# EAGLE board SparkFun_Qwiic_UV_Sensor_AS7331-Panel (EAGLE 9.6.2), part 1 of 4
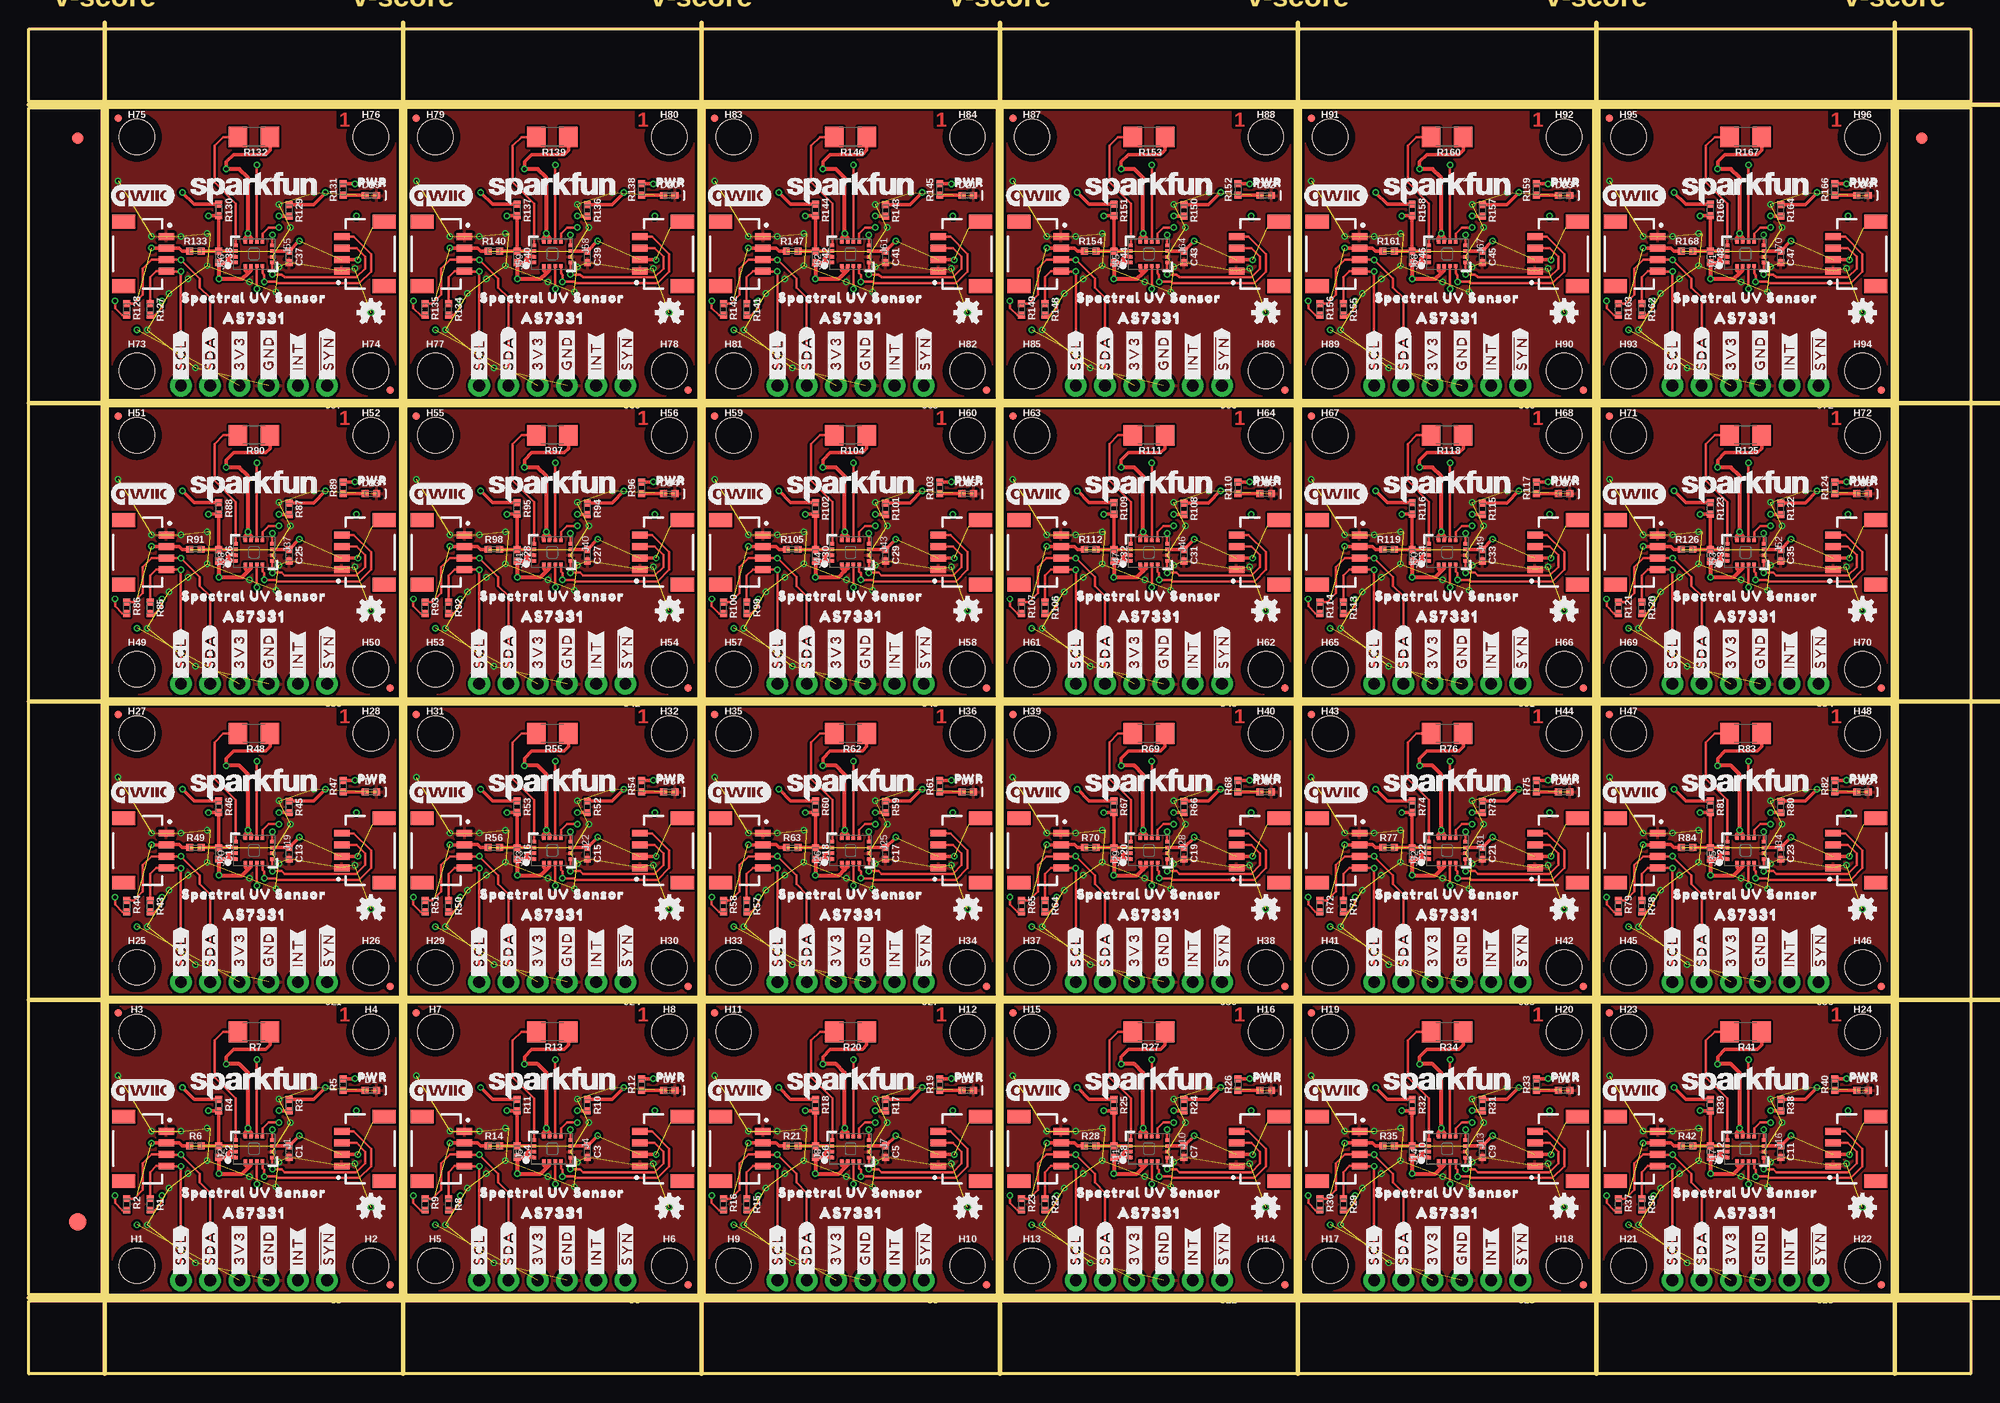
[diagram p0: board, top side]
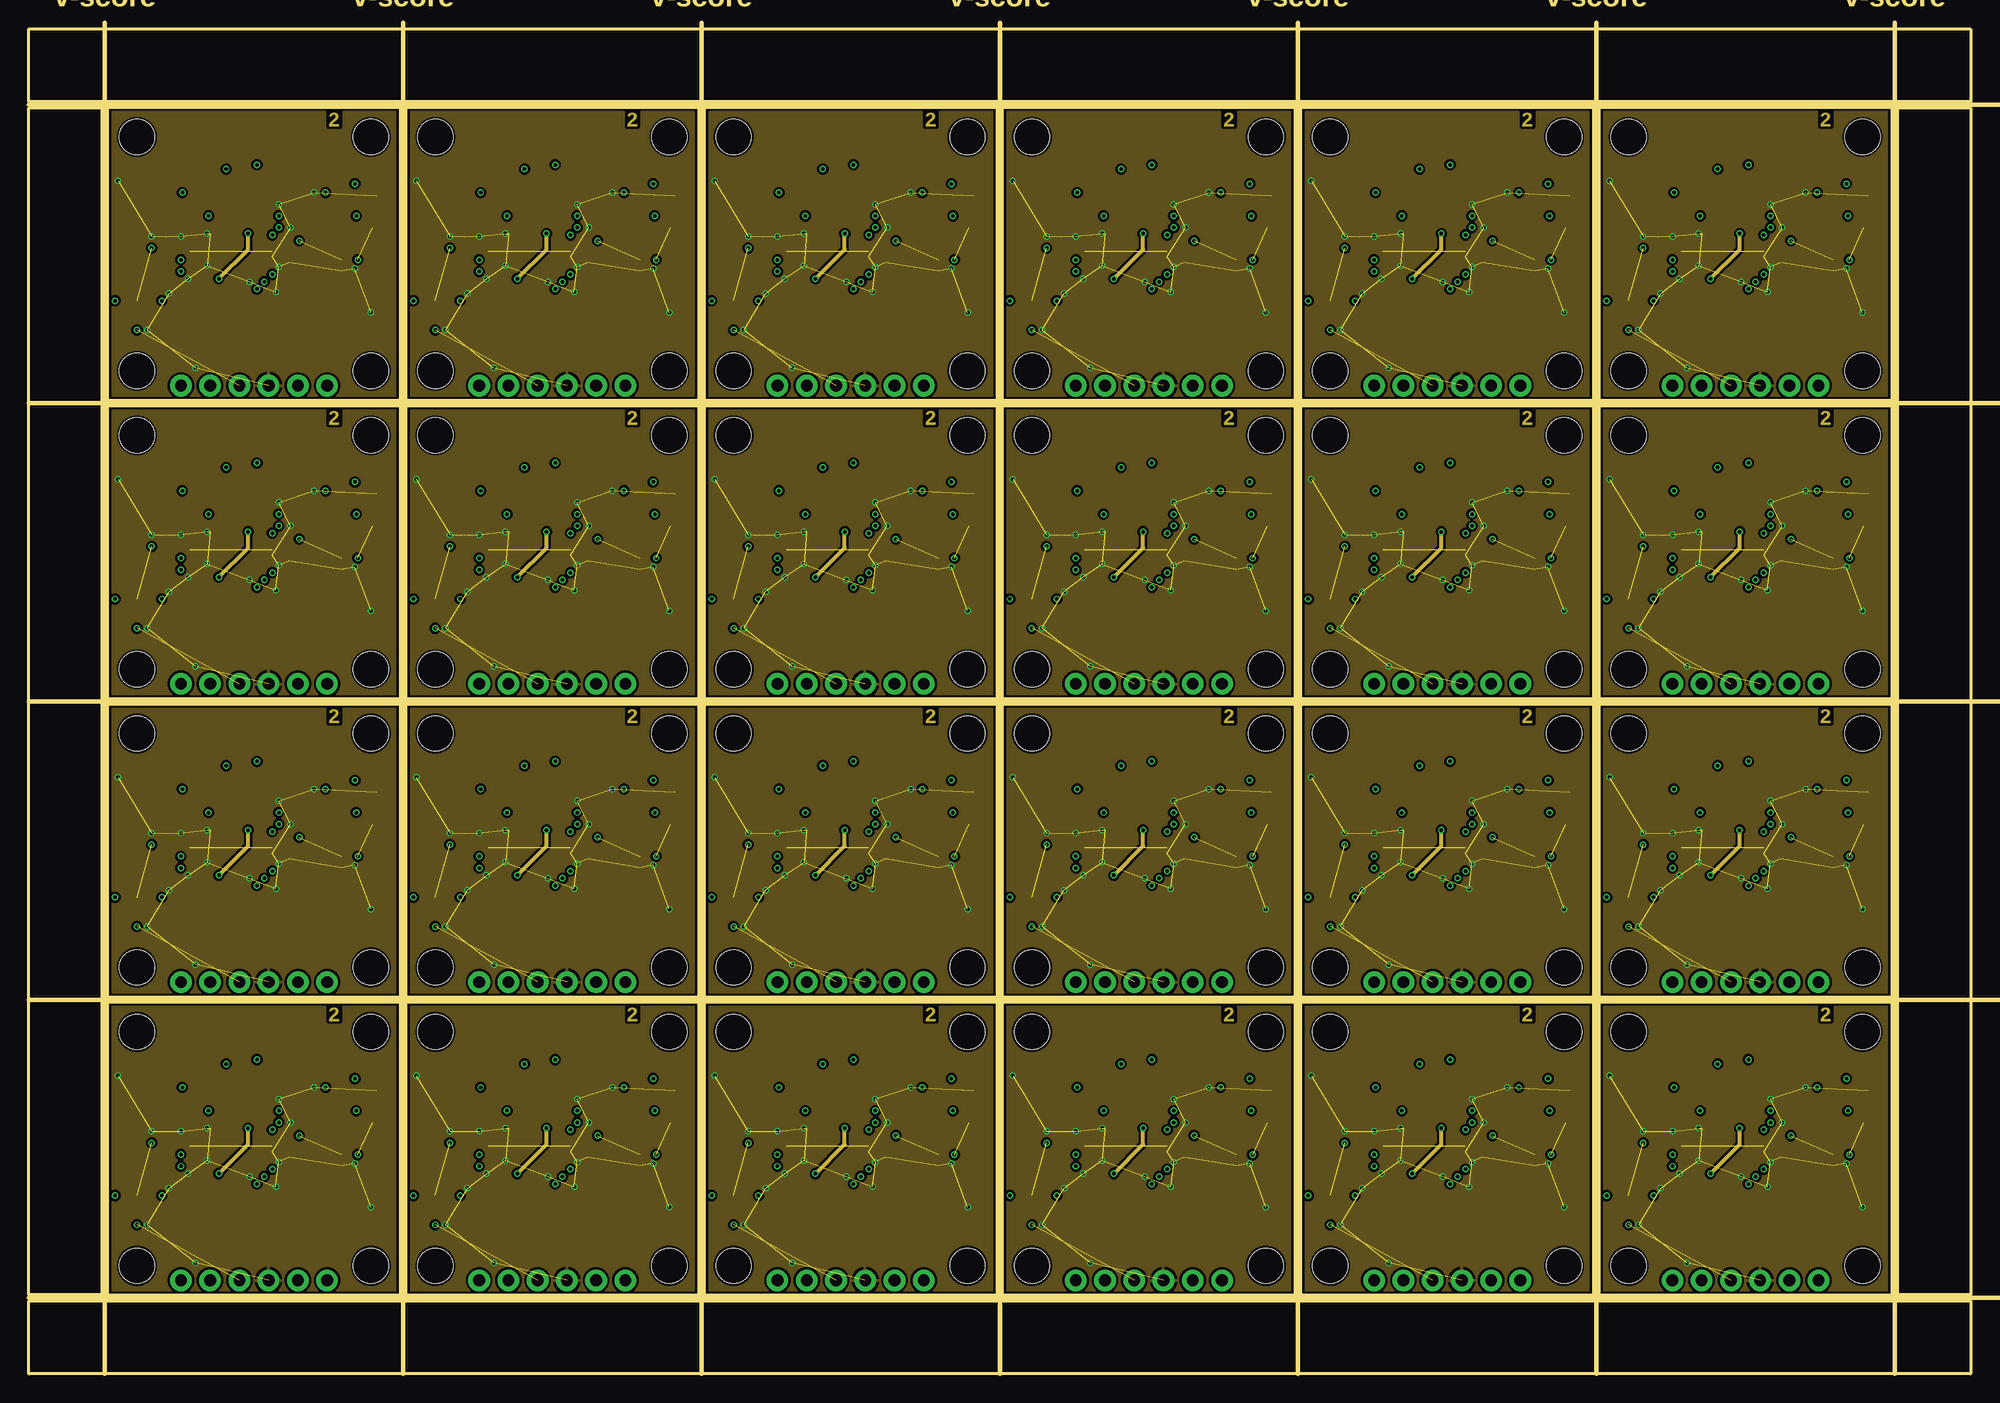
[diagram p1: board, inner layer Route2]
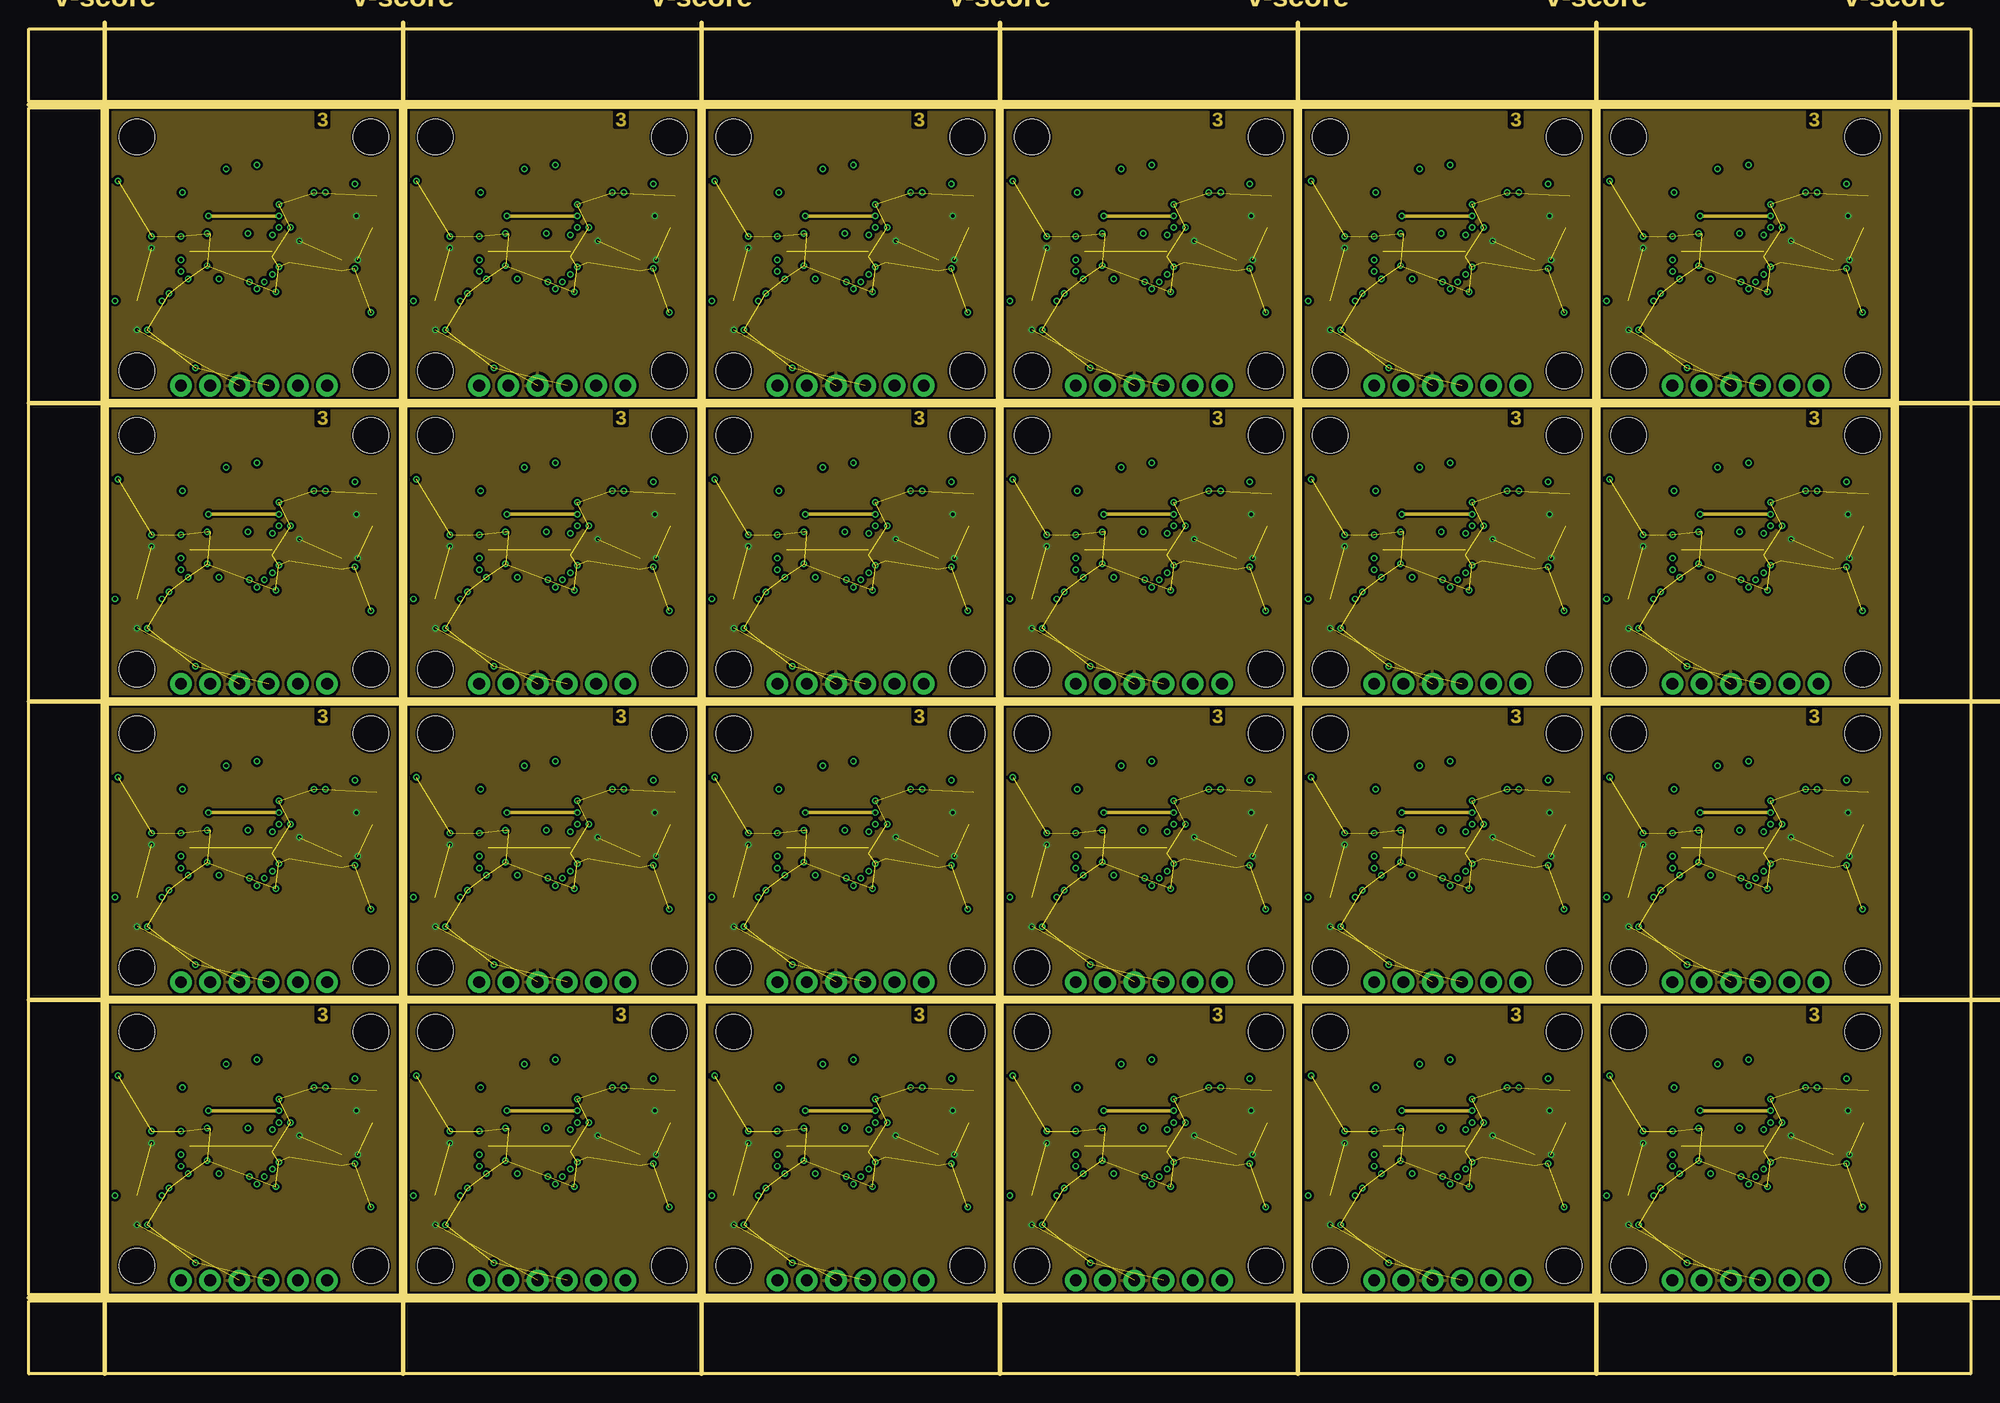
[diagram p2: board, inner layer Route15]
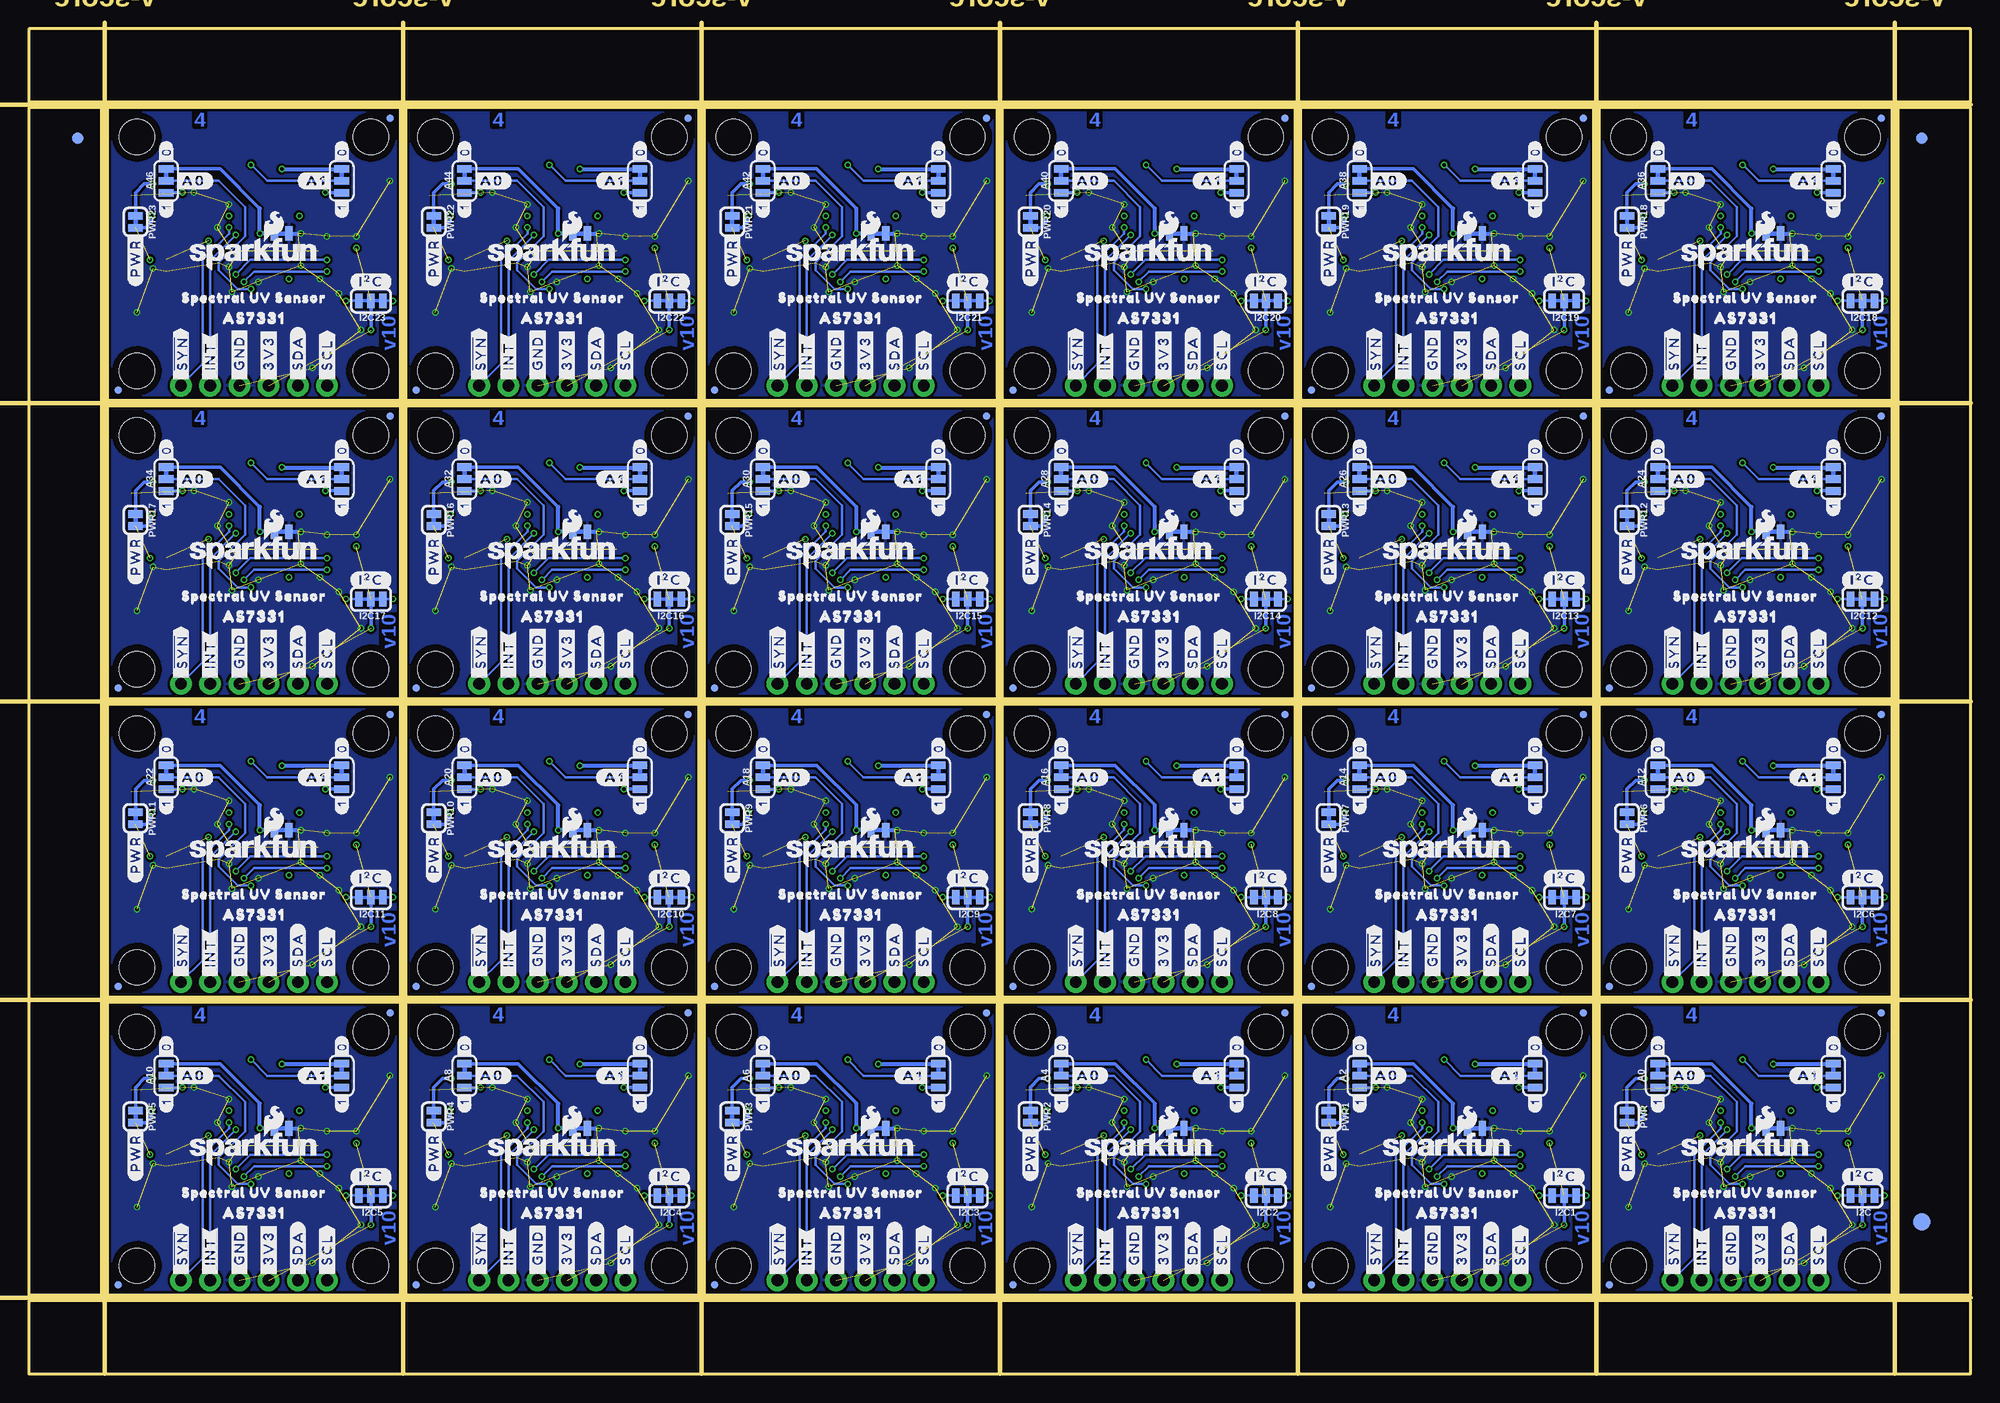
[diagram p3: board, bottom side, seen from below]

Size 168.66 x 116.84 mm. Coordinates in mm from the lower left corner, seen from the top.
Outline: 6.86,6.86 32.26,6.86 32.26,32.26 6.86,32.26 6.86,6.86
Outline: 32.77,6.86 58.17,6.86 58.17,32.26 32.77,32.26 32.77,6.86
Outline: 58.67,6.86 84.07,6.86 84.07,32.26 58.67,32.26 58.67,6.86
Outline: 84.58,6.86 109.98,6.86 109.98,32.26 84.58,32.26 84.58,6.86
Outline: 110.49,6.86 135.89,6.86 135.89,32.26 110.49,32.26 110.49,6.86
Outline: 136.4,6.86 161.8,6.86 161.8,32.26 136.4,32.26 136.4,6.86
Outline: 6.86,32.77 32.26,32.77 32.26,58.17 6.86,58.17 6.86,32.77
Outline: 32.77,32.77 58.17,32.77 58.17,58.17 32.77,58.17 32.77,32.77
Outline: 58.67,32.77 84.07,32.77 84.07,58.17 58.67,58.17 58.67,32.77
Outline: 84.58,32.77 109.98,32.77 109.98,58.17 84.58,58.17 84.58,32.77
Outline: 110.49,32.77 135.89,32.77 135.89,58.17 110.49,58.17 110.49,32.77
Outline: 136.4,32.77 161.8,32.77 161.8,58.17 136.4,58.17 136.4,32.77
Outline: 6.86,58.67 32.26,58.67 32.26,84.07 6.86,84.07 6.86,58.67
Outline: 32.77,58.67 58.17,58.67 58.17,84.07 32.77,84.07 32.77,58.67
Outline: 58.67,58.67 84.07,58.67 84.07,84.07 58.67,84.07 58.67,58.67
Outline: 84.58,58.67 109.98,58.67 109.98,84.07 84.58,84.07 84.58,58.67
Outline: 110.49,58.67 135.89,58.67 135.89,84.07 110.49,84.07 110.49,58.67
Outline: 136.4,58.67 161.8,58.67 161.8,84.07 136.4,84.07 136.4,58.67
Outline: 6.86,84.58 32.26,84.58 32.26,109.98 6.86,109.98 6.86,84.58
Outline: 32.77,84.58 58.17,84.58 58.17,109.98 32.77,109.98 32.77,84.58
Outline: 58.67,84.58 84.07,84.58 84.07,109.98 58.67,109.98 58.67,84.58
Outline: 84.58,84.58 109.98,84.58 109.98,109.98 84.58,109.98 84.58,84.58
Outline: 110.49,84.58 135.89,84.58 135.89,109.98 110.49,109.98 110.49,84.58
Outline: 136.4,84.58 161.8,84.58 161.8,109.98 136.4,109.98 136.4,84.58
Outline: 0,6.35 168.66,6.35 168.66,0 0,0 0,6.35
Outline: 162.31,109.98 168.66,109.98 168.66,6.86 162.31,6.86 162.31,109.98
Outline: 0,116.84 168.66,116.84 168.66,110.49 0,110.49 0,116.84
Outline: 0,109.98 6.35,109.98 6.35,6.86 0,6.86 0,109.98
Copper layers (1*2*15*16): Top 0.035559375mm / dielectric 0.47751875mm / Route2 0.035559375mm / dielectric 0.47751875mm / Route15 0.035559375mm / dielectric 0.47751875mm / Bottom 0.035559375mm
Design rules "SparkFun_Qwiic_UV_Sensor_AS7331": minimum track width 5mil, minimum drill 0.2mm, track to track 5mil, track to pad 5mil, pad to pad 5mil, via to via 5mil, smd to smd 5mil, copper to edge 7mil, drill to drill 7mil, minimum pad ring 5mil, minimum via ring 5mil, stop-mask expansion 2.5mil, vias tented up to drill 25mil, thermal gap 10mil
Milling: 12 lines

## Footprints (pad centres in the part's own frame; a part is rotated, then mirrored left to right if it is on the bottom)
SMT-JUMPER_3_1-NC_TRACE_SILK = smd 0.66 x 1.27: 1 -1.041,0; 2 0,0; 3 1.041,0
0402-TIGHT = smd 0.6 x 0.6: 1 -0.5,0; 2 0.5,0
LED-0402 = smd 0.6 x 0.6: A -0.5,0; C 0.5,0
FIDUCIAL-1X2 = smd 1 x 1: 1 0,0
FIDUCIAL-1.5X3 = smd 1.5 x 1.5: 1 0,0
FIDUCIAL-MICRO = smd 0.635 x 0.635: 1 0,0
STAND-OFF-TIGHT = hole 3.048: 0,0
SMT-JUMPER_3_2-NC_TRACE_SILK = smd 0.66 x 1.27: 1 -1.041,0; 2 0,0; 3 1.041,0
JST04_1MM_RA = smd 0.6 x 1.35: 1 -1.5,0; 2 -0.5,0; 3 0.5,0; 4 1.5,0 | smd 1.2 x 2: NC1 2.8,-3.675; NC2 -2.8,-3.675
1X06_NO_SILK = drill 1.016 pad 1.88: 1 0,0; 2 2.54,0; 3 5.08,0; 4 7.62,0; 5 10.16,0; 6 12.7,0
SMT-JUMPER_2_NC_TRACE_SILK = smd 0.66 x 1.27: 1 -0.521,0; 2 0.521,0
1206 = smd 1.6 x 1.8: 1 -1.4,0; 2 1.4,0
2PT_GND_TIE = smd 1.27 x 0.635: P$1 0,0.635; P$2 0,-0.635
OLGA16 = smd 0.3 x 0.3: 1 -0.75,1.575; 2 -0.25,1.575; 3 0.25,1.575; 4 0.75,1.575; 5 1.05,0.75; 6 1.05,0.25; 7 1.05,-0.25; 8 1.05,-0.75; 9 0.75,-1.575; 10 0.25,-1.575; 11 -0.25,-1.575; 12 -0.75,-1.575; 13 -1.05,-0.75; 14 -1.05,-0.25; 15 -1.05,0.25; 16 -1.05,0.75

## Placement (x,y rotation side)
A0  JUMPER-SMT_3_1-NC_TRACE_SILK  [SMT-JUMPER_3_1-NC_TRACE_SILK]  27.18,25.91 90 bottom
A1  JUMPER-SMT_3_1-NC_TRACE_SILK  [SMT-JUMPER_3_1-NC_TRACE_SILK]  11.94,25.91 90 bottom
A2  JUMPER-SMT_3_1-NC_TRACE_SILK  [SMT-JUMPER_3_1-NC_TRACE_SILK]  53.09,25.91 90 bottom
A3  JUMPER-SMT_3_1-NC_TRACE_SILK  [SMT-JUMPER_3_1-NC_TRACE_SILK]  37.85,25.91 90 bottom
A4  JUMPER-SMT_3_1-NC_TRACE_SILK  [SMT-JUMPER_3_1-NC_TRACE_SILK]  78.99,25.91 90 bottom
A5  JUMPER-SMT_3_1-NC_TRACE_SILK  [SMT-JUMPER_3_1-NC_TRACE_SILK]  63.75,25.91 90 bottom
A6  JUMPER-SMT_3_1-NC_TRACE_SILK  [SMT-JUMPER_3_1-NC_TRACE_SILK]  104.9,25.91 90 bottom
A7  JUMPER-SMT_3_1-NC_TRACE_SILK  [SMT-JUMPER_3_1-NC_TRACE_SILK]  89.66,25.91 90 bottom
A8  JUMPER-SMT_3_1-NC_TRACE_SILK  [SMT-JUMPER_3_1-NC_TRACE_SILK]  130.81,25.91 90 bottom
A9  JUMPER-SMT_3_1-NC_TRACE_SILK  [SMT-JUMPER_3_1-NC_TRACE_SILK]  115.57,25.91 90 bottom
A10  JUMPER-SMT_3_1-NC_TRACE_SILK  [SMT-JUMPER_3_1-NC_TRACE_SILK]  156.72,25.91 90 bottom
A11  JUMPER-SMT_3_1-NC_TRACE_SILK  [SMT-JUMPER_3_1-NC_TRACE_SILK]  141.48,25.91 90 bottom
A12  JUMPER-SMT_3_1-NC_TRACE_SILK  [SMT-JUMPER_3_1-NC_TRACE_SILK]  27.18,51.82 90 bottom
A13  JUMPER-SMT_3_1-NC_TRACE_SILK  [SMT-JUMPER_3_1-NC_TRACE_SILK]  11.94,51.82 90 bottom
A14  JUMPER-SMT_3_1-NC_TRACE_SILK  [SMT-JUMPER_3_1-NC_TRACE_SILK]  53.09,51.82 90 bottom
A15  JUMPER-SMT_3_1-NC_TRACE_SILK  [SMT-JUMPER_3_1-NC_TRACE_SILK]  37.85,51.82 90 bottom
A16  JUMPER-SMT_3_1-NC_TRACE_SILK  [SMT-JUMPER_3_1-NC_TRACE_SILK]  78.99,51.82 90 bottom
A17  JUMPER-SMT_3_1-NC_TRACE_SILK  [SMT-JUMPER_3_1-NC_TRACE_SILK]  63.75,51.82 90 bottom
A18  JUMPER-SMT_3_1-NC_TRACE_SILK  [SMT-JUMPER_3_1-NC_TRACE_SILK]  104.9,51.82 90 bottom
A19  JUMPER-SMT_3_1-NC_TRACE_SILK  [SMT-JUMPER_3_1-NC_TRACE_SILK]  89.66,51.82 90 bottom
A20  JUMPER-SMT_3_1-NC_TRACE_SILK  [SMT-JUMPER_3_1-NC_TRACE_SILK]  130.81,51.82 90 bottom
A21  JUMPER-SMT_3_1-NC_TRACE_SILK  [SMT-JUMPER_3_1-NC_TRACE_SILK]  115.57,51.82 90 bottom
A22  JUMPER-SMT_3_1-NC_TRACE_SILK  [SMT-JUMPER_3_1-NC_TRACE_SILK]  156.72,51.82 90 bottom
A23  JUMPER-SMT_3_1-NC_TRACE_SILK  [SMT-JUMPER_3_1-NC_TRACE_SILK]  141.48,51.82 90 bottom
A24  JUMPER-SMT_3_1-NC_TRACE_SILK  [SMT-JUMPER_3_1-NC_TRACE_SILK]  27.18,77.72 90 bottom
A25  JUMPER-SMT_3_1-NC_TRACE_SILK  [SMT-JUMPER_3_1-NC_TRACE_SILK]  11.94,77.72 90 bottom
A26  JUMPER-SMT_3_1-NC_TRACE_SILK  [SMT-JUMPER_3_1-NC_TRACE_SILK]  53.09,77.72 90 bottom
A27  JUMPER-SMT_3_1-NC_TRACE_SILK  [SMT-JUMPER_3_1-NC_TRACE_SILK]  37.85,77.72 90 bottom
A28  JUMPER-SMT_3_1-NC_TRACE_SILK  [SMT-JUMPER_3_1-NC_TRACE_SILK]  78.99,77.72 90 bottom
A29  JUMPER-SMT_3_1-NC_TRACE_SILK  [SMT-JUMPER_3_1-NC_TRACE_SILK]  63.75,77.72 90 bottom
A30  JUMPER-SMT_3_1-NC_TRACE_SILK  [SMT-JUMPER_3_1-NC_TRACE_SILK]  104.9,77.72 90 bottom
A31  JUMPER-SMT_3_1-NC_TRACE_SILK  [SMT-JUMPER_3_1-NC_TRACE_SILK]  89.66,77.72 90 bottom
A32  JUMPER-SMT_3_1-NC_TRACE_SILK  [SMT-JUMPER_3_1-NC_TRACE_SILK]  130.81,77.72 90 bottom
A33  JUMPER-SMT_3_1-NC_TRACE_SILK  [SMT-JUMPER_3_1-NC_TRACE_SILK]  115.57,77.72 90 bottom
A34  JUMPER-SMT_3_1-NC_TRACE_SILK  [SMT-JUMPER_3_1-NC_TRACE_SILK]  156.72,77.72 90 bottom
A35  JUMPER-SMT_3_1-NC_TRACE_SILK  [SMT-JUMPER_3_1-NC_TRACE_SILK]  141.48,77.72 90 bottom
A36  JUMPER-SMT_3_1-NC_TRACE_SILK  [SMT-JUMPER_3_1-NC_TRACE_SILK]  27.18,103.63 90 bottom
A37  JUMPER-SMT_3_1-NC_TRACE_SILK  [SMT-JUMPER_3_1-NC_TRACE_SILK]  11.94,103.63 90 bottom
A38  JUMPER-SMT_3_1-NC_TRACE_SILK  [SMT-JUMPER_3_1-NC_TRACE_SILK]  53.09,103.63 90 bottom
A39  JUMPER-SMT_3_1-NC_TRACE_SILK  [SMT-JUMPER_3_1-NC_TRACE_SILK]  37.85,103.63 90 bottom
A40  JUMPER-SMT_3_1-NC_TRACE_SILK  [SMT-JUMPER_3_1-NC_TRACE_SILK]  78.99,103.63 90 bottom
A41  JUMPER-SMT_3_1-NC_TRACE_SILK  [SMT-JUMPER_3_1-NC_TRACE_SILK]  63.75,103.63 90 bottom
A42  JUMPER-SMT_3_1-NC_TRACE_SILK  [SMT-JUMPER_3_1-NC_TRACE_SILK]  104.9,103.63 90 bottom
A43  JUMPER-SMT_3_1-NC_TRACE_SILK  [SMT-JUMPER_3_1-NC_TRACE_SILK]  89.66,103.63 90 bottom
A44  JUMPER-SMT_3_1-NC_TRACE_SILK  [SMT-JUMPER_3_1-NC_TRACE_SILK]  130.81,103.63 90 bottom
A45  JUMPER-SMT_3_1-NC_TRACE_SILK  [SMT-JUMPER_3_1-NC_TRACE_SILK]  115.57,103.63 90 bottom
A46  JUMPER-SMT_3_1-NC_TRACE_SILK  [SMT-JUMPER_3_1-NC_TRACE_SILK]  156.72,103.63 90 bottom
A47  JUMPER-SMT_3_1-NC_TRACE_SILK  [SMT-JUMPER_3_1-NC_TRACE_SILK]  141.48,103.63 90 bottom
C1  0.1uF  [0402-TIGHT]  22.61,19.3 270 top
C2  0.1uF  [0402-TIGHT]  16.51,19.3 270 top
C3  0.1uF  [0402-TIGHT]  48.51,19.3 270 top
C4  0.1uF  [0402-TIGHT]  42.42,19.3 270 top
C5  0.1uF  [0402-TIGHT]  74.42,19.3 270 top
C6  0.1uF  [0402-TIGHT]  68.33,19.3 270 top
C7  0.1uF  [0402-TIGHT]  100.33,19.3 270 top
C8  0.1uF  [0402-TIGHT]  94.23,19.3 270 top
C9  0.1uF  [0402-TIGHT]  126.24,19.3 270 top
C10  0.1uF  [0402-TIGHT]  120.14,19.3 270 top
C11  0.1uF  [0402-TIGHT]  152.15,19.3 270 top
C12  0.1uF  [0402-TIGHT]  146.05,19.3 270 top
C13  0.1uF  [0402-TIGHT]  22.61,45.21 270 top
C14  0.1uF  [0402-TIGHT]  16.51,45.21 270 top
C15  0.1uF  [0402-TIGHT]  48.51,45.21 270 top
C16  0.1uF  [0402-TIGHT]  42.42,45.21 270 top
C17  0.1uF  [0402-TIGHT]  74.42,45.21 270 top
C18  0.1uF  [0402-TIGHT]  68.33,45.21 270 top
C19  0.1uF  [0402-TIGHT]  100.33,45.21 270 top
C20  0.1uF  [0402-TIGHT]  94.23,45.21 270 top
C21  0.1uF  [0402-TIGHT]  126.24,45.21 270 top
C22  0.1uF  [0402-TIGHT]  120.14,45.21 270 top
C23  0.1uF  [0402-TIGHT]  152.15,45.21 270 top
C24  0.1uF  [0402-TIGHT]  146.05,45.21 270 top
C25  0.1uF  [0402-TIGHT]  22.61,71.12 270 top
C26  0.1uF  [0402-TIGHT]  16.51,71.12 270 top
C27  0.1uF  [0402-TIGHT]  48.51,71.12 270 top
C28  0.1uF  [0402-TIGHT]  42.42,71.12 270 top
C29  0.1uF  [0402-TIGHT]  74.42,71.12 270 top
C30  0.1uF  [0402-TIGHT]  68.33,71.12 270 top
C31  0.1uF  [0402-TIGHT]  100.33,71.12 270 top
C32  0.1uF  [0402-TIGHT]  94.23,71.12 270 top
C33  0.1uF  [0402-TIGHT]  126.24,71.12 270 top
C34  0.1uF  [0402-TIGHT]  120.14,71.12 270 top
C35  0.1uF  [0402-TIGHT]  152.15,71.12 270 top
C36  0.1uF  [0402-TIGHT]  146.05,71.12 270 top
C37  0.1uF  [0402-TIGHT]  22.61,97.03 270 top
C38  0.1uF  [0402-TIGHT]  16.51,97.03 270 top
C39  0.1uF  [0402-TIGHT]  48.51,97.03 270 top
C40  0.1uF  [0402-TIGHT]  42.42,97.03 270 top
C41  0.1uF  [0402-TIGHT]  74.42,97.03 270 top
C42  0.1uF  [0402-TIGHT]  68.33,97.03 270 top
C43  0.1uF  [0402-TIGHT]  100.33,97.03 270 top
C44  0.1uF  [0402-TIGHT]  94.23,97.03 270 top
C45  0.1uF  [0402-TIGHT]  126.24,97.03 270 top
C46  0.1uF  [0402-TIGHT]  120.14,97.03 270 top
C47  0.1uF  [0402-TIGHT]  152.15,97.03 270 top
C48  0.1uF  [0402-TIGHT]  146.05,97.03 270 top
D1  RED  [LED-0402]  29.72,24.64 0 top
D2  RED  [LED-0402]  55.63,24.64 0 top
D3  RED  [LED-0402]  81.53,24.64 0 top
D4  RED  [LED-0402]  107.44,24.64 0 top
D5  RED  [LED-0402]  133.35,24.64 0 top
D6  RED  [LED-0402]  159.26,24.64 0 top
D7  RED  [LED-0402]  29.72,50.55 0 top
D8  RED  [LED-0402]  55.63,50.55 0 top
D9  RED  [LED-0402]  81.53,50.55 0 top
D10  RED  [LED-0402]  107.44,50.55 0 top
D11  RED  [LED-0402]  133.35,50.55 0 top
D12  RED  [LED-0402]  159.26,50.55 0 top
D13  RED  [LED-0402]  29.72,76.45 0 top
D14  RED  [LED-0402]  55.63,76.45 0 top
D15  RED  [LED-0402]  81.53,76.45 0 top
D16  RED  [LED-0402]  107.44,76.45 0 top
D17  RED  [LED-0402]  133.35,76.45 0 top
D18  RED  [LED-0402]  159.26,76.45 0 top
D19  RED  [LED-0402]  29.72,102.36 0 top
D20  RED  [LED-0402]  55.63,102.36 0 top
D21  RED  [LED-0402]  81.53,102.36 0 top
D22  RED  [LED-0402]  107.44,102.36 0 top
D23  RED  [LED-0402]  133.35,102.36 0 top
D24  RED  [LED-0402]  159.26,102.36 0 top
E$1  [FIDUCIAL-1X2]  4.23,107.31 0 top
E$2  [FIDUCIAL-1X2]  4.23,107.31 0 bottom
E$3  [FIDUCIAL-1X2]  164.42,107.31 0 top
E$4  [FIDUCIAL-1X2]  164.42,107.31 0 bottom
E$5  [FIDUCIAL-1.5X3]  4.23,13.21 0 top
E$6  [FIDUCIAL-1.5X3]  4.23,13.21 0 bottom
FD1  FIDUCIALUFIDUCIAL  [FIDUCIAL-MICRO]  7.75,31.37 0 top
FD2  FIDUCIALUFIDUCIAL  [FIDUCIAL-MICRO]  31.37,7.75 0 top
FD3  FIDUCIALUFIDUCIAL  [FIDUCIAL-MICRO]  7.75,31.37 0 bottom
FD4  FIDUCIALUFIDUCIAL  [FIDUCIAL-MICRO]  31.37,7.75 0 bottom
FD5  FIDUCIALUFIDUCIAL  [FIDUCIAL-MICRO]  33.66,31.37 0 top
FD6  FIDUCIALUFIDUCIAL  [FIDUCIAL-MICRO]  57.28,7.75 0 top
FD7  FIDUCIALUFIDUCIAL  [FIDUCIAL-MICRO]  33.66,31.37 0 bottom
FD8  FIDUCIALUFIDUCIAL  [FIDUCIAL-MICRO]  57.28,7.75 0 bottom
FD9  FIDUCIALUFIDUCIAL  [FIDUCIAL-MICRO]  59.56,31.37 0 top
FD10  FIDUCIALUFIDUCIAL  [FIDUCIAL-MICRO]  83.19,7.75 0 top
FD11  FIDUCIALUFIDUCIAL  [FIDUCIAL-MICRO]  59.56,31.37 0 bottom
FD12  FIDUCIALUFIDUCIAL  [FIDUCIAL-MICRO]  83.19,7.75 0 bottom
FD13  FIDUCIALUFIDUCIAL  [FIDUCIAL-MICRO]  85.47,31.37 0 top
FD14  FIDUCIALUFIDUCIAL  [FIDUCIAL-MICRO]  109.09,7.75 0 top
FD15  FIDUCIALUFIDUCIAL  [FIDUCIAL-MICRO]  85.47,31.37 0 bottom
FD16  FIDUCIALUFIDUCIAL  [FIDUCIAL-MICRO]  109.09,7.75 0 bottom
FD17  FIDUCIALUFIDUCIAL  [FIDUCIAL-MICRO]  111.38,31.37 0 top
FD18  FIDUCIALUFIDUCIAL  [FIDUCIAL-MICRO]  135,7.75 0 top
FD19  FIDUCIALUFIDUCIAL  [FIDUCIAL-MICRO]  111.38,31.37 0 bottom
FD20  FIDUCIALUFIDUCIAL  [FIDUCIAL-MICRO]  135,7.75 0 bottom
FD21  FIDUCIALUFIDUCIAL  [FIDUCIAL-MICRO]  137.29,31.37 0 top
FD22  FIDUCIALUFIDUCIAL  [FIDUCIAL-MICRO]  160.91,7.75 0 top
FD23  FIDUCIALUFIDUCIAL  [FIDUCIAL-MICRO]  137.29,31.37 0 bottom
FD24  FIDUCIALUFIDUCIAL  [FIDUCIAL-MICRO]  160.91,7.75 0 bottom
FD25  FIDUCIALUFIDUCIAL  [FIDUCIAL-MICRO]  7.75,57.28 0 top
FD26  FIDUCIALUFIDUCIAL  [FIDUCIAL-MICRO]  31.37,33.66 0 top
FD27  FIDUCIALUFIDUCIAL  [FIDUCIAL-MICRO]  7.75,57.28 0 bottom
FD28  FIDUCIALUFIDUCIAL  [FIDUCIAL-MICRO]  31.37,33.66 0 bottom
FD29  FIDUCIALUFIDUCIAL  [FIDUCIAL-MICRO]  33.66,57.28 0 top
FD30  FIDUCIALUFIDUCIAL  [FIDUCIAL-MICRO]  57.28,33.66 0 top
FD31  FIDUCIALUFIDUCIAL  [FIDUCIAL-MICRO]  33.66,57.28 0 bottom
FD32  FIDUCIALUFIDUCIAL  [FIDUCIAL-MICRO]  57.28,33.66 0 bottom
FD33  FIDUCIALUFIDUCIAL  [FIDUCIAL-MICRO]  59.56,57.28 0 top
FD34  FIDUCIALUFIDUCIAL  [FIDUCIAL-MICRO]  83.19,33.66 0 top
FD35  FIDUCIALUFIDUCIAL  [FIDUCIAL-MICRO]  59.56,57.28 0 bottom
FD36  FIDUCIALUFIDUCIAL  [FIDUCIAL-MICRO]  83.19,33.66 0 bottom
FD37  FIDUCIALUFIDUCIAL  [FIDUCIAL-MICRO]  85.47,57.28 0 top
FD38  FIDUCIALUFIDUCIAL  [FIDUCIAL-MICRO]  109.09,33.66 0 top
FD39  FIDUCIALUFIDUCIAL  [FIDUCIAL-MICRO]  85.47,57.28 0 bottom
FD40  FIDUCIALUFIDUCIAL  [FIDUCIAL-MICRO]  109.09,33.66 0 bottom
FD41  FIDUCIALUFIDUCIAL  [FIDUCIAL-MICRO]  111.38,57.28 0 top
FD42  FIDUCIALUFIDUCIAL  [FIDUCIAL-MICRO]  135,33.66 0 top
FD43  FIDUCIALUFIDUCIAL  [FIDUCIAL-MICRO]  111.38,57.28 0 bottom
FD44  FIDUCIALUFIDUCIAL  [FIDUCIAL-MICRO]  135,33.66 0 bottom
FD45  FIDUCIALUFIDUCIAL  [FIDUCIAL-MICRO]  137.29,57.28 0 top
FD46  FIDUCIALUFIDUCIAL  [FIDUCIAL-MICRO]  160.91,33.66 0 top
FD47  FIDUCIALUFIDUCIAL  [FIDUCIAL-MICRO]  137.29,57.28 0 bottom
FD48  FIDUCIALUFIDUCIAL  [FIDUCIAL-MICRO]  160.91,33.66 0 bottom
FD49  FIDUCIALUFIDUCIAL  [FIDUCIAL-MICRO]  7.75,83.19 0 top
FD50  FIDUCIALUFIDUCIAL  [FIDUCIAL-MICRO]  31.37,59.56 0 top
FD51  FIDUCIALUFIDUCIAL  [FIDUCIAL-MICRO]  7.75,83.19 0 bottom
FD52  FIDUCIALUFIDUCIAL  [FIDUCIAL-MICRO]  31.37,59.56 0 bottom
FD53  FIDUCIALUFIDUCIAL  [FIDUCIAL-MICRO]  33.66,83.19 0 top
FD54  FIDUCIALUFIDUCIAL  [FIDUCIAL-MICRO]  57.28,59.56 0 top
FD55  FIDUCIALUFIDUCIAL  [FIDUCIAL-MICRO]  33.66,83.19 0 bottom
FD56  FIDUCIALUFIDUCIAL  [FIDUCIAL-MICRO]  57.28,59.56 0 bottom
FD57  FIDUCIALUFIDUCIAL  [FIDUCIAL-MICRO]  59.56,83.19 0 top
FD58  FIDUCIALUFIDUCIAL  [FIDUCIAL-MICRO]  83.19,59.56 0 top
FD59  FIDUCIALUFIDUCIAL  [FIDUCIAL-MICRO]  59.56,83.19 0 bottom
FD60  FIDUCIALUFIDUCIAL  [FIDUCIAL-MICRO]  83.19,59.56 0 bottom
FD61  FIDUCIALUFIDUCIAL  [FIDUCIAL-MICRO]  85.47,83.19 0 top
FD62  FIDUCIALUFIDUCIAL  [FIDUCIAL-MICRO]  109.09,59.56 0 top
FD63  FIDUCIALUFIDUCIAL  [FIDUCIAL-MICRO]  85.47,83.19 0 bottom
FD64  FIDUCIALUFIDUCIAL  [FIDUCIAL-MICRO]  109.09,59.56 0 bottom
FD65  FIDUCIALUFIDUCIAL  [FIDUCIAL-MICRO]  111.38,83.19 0 top
FD66  FIDUCIALUFIDUCIAL  [FIDUCIAL-MICRO]  135,59.56 0 top
FD67  FIDUCIALUFIDUCIAL  [FIDUCIAL-MICRO]  111.38,83.19 0 bottom
FD68  FIDUCIALUFIDUCIAL  [FIDUCIAL-MICRO]  135,59.56 0 bottom
FD69  FIDUCIALUFIDUCIAL  [FIDUCIAL-MICRO]  137.29,83.19 0 top
FD70  FIDUCIALUFIDUCIAL  [FIDUCIAL-MICRO]  160.91,59.56 0 top
FD71  FIDUCIALUFIDUCIAL  [FIDUCIAL-MICRO]  137.29,83.19 0 bottom
FD72  FIDUCIALUFIDUCIAL  [FIDUCIAL-MICRO]  160.91,59.56 0 bottom
FD73  FIDUCIALUFIDUCIAL  [FIDUCIAL-MICRO]  7.75,109.09 0 top
FD74  FIDUCIALUFIDUCIAL  [FIDUCIAL-MICRO]  31.37,85.47 0 top
FD75  FIDUCIALUFIDUCIAL  [FIDUCIAL-MICRO]  7.75,109.09 0 bottom
FD76  FIDUCIALUFIDUCIAL  [FIDUCIAL-MICRO]  31.37,85.47 0 bottom
FD77  FIDUCIALUFIDUCIAL  [FIDUCIAL-MICRO]  33.66,109.09 0 top
FD78  FIDUCIALUFIDUCIAL  [FIDUCIAL-MICRO]  57.28,85.47 0 top
FD79  FIDUCIALUFIDUCIAL  [FIDUCIAL-MICRO]  33.66,109.09 0 bottom
FD80  FIDUCIALUFIDUCIAL  [FIDUCIAL-MICRO]  57.28,85.47 0 bottom
FD81  FIDUCIALUFIDUCIAL  [FIDUCIAL-MICRO]  59.56,109.09 0 top
FD82  FIDUCIALUFIDUCIAL  [FIDUCIAL-MICRO]  83.19,85.47 0 top
FD83  FIDUCIALUFIDUCIAL  [FIDUCIAL-MICRO]  59.56,109.09 0 bottom
FD84  FIDUCIALUFIDUCIAL  [FIDUCIAL-MICRO]  83.19,85.47 0 bottom
FD85  FIDUCIALUFIDUCIAL  [FIDUCIAL-MICRO]  85.47,109.09 0 top
FD86  FIDUCIALUFIDUCIAL  [FIDUCIAL-MICRO]  109.09,85.47 0 top
FD87  FIDUCIALUFIDUCIAL  [FIDUCIAL-MICRO]  85.47,109.09 0 bottom
FD88  FIDUCIALUFIDUCIAL  [FIDUCIAL-MICRO]  109.09,85.47 0 bottom
FD89  FIDUCIALUFIDUCIAL  [FIDUCIAL-MICRO]  111.38,109.09 0 top
FD90  FIDUCIALUFIDUCIAL  [FIDUCIAL-MICRO]  135,85.47 0 top
FD91  FIDUCIALUFIDUCIAL  [FIDUCIAL-MICRO]  111.38,109.09 0 bottom
FD92  FIDUCIALUFIDUCIAL  [FIDUCIAL-MICRO]  135,85.47 0 bottom
FD93  FIDUCIALUFIDUCIAL  [FIDUCIAL-MICRO]  137.29,109.09 0 top
FD94  FIDUCIALUFIDUCIAL  [FIDUCIAL-MICRO]  160.91,85.47 0 top
FD95  FIDUCIALUFIDUCIAL  [FIDUCIAL-MICRO]  137.29,109.09 0 bottom
FD96  FIDUCIALUFIDUCIAL  [FIDUCIAL-MICRO]  160.91,85.47 0 bottom
H1  STAND-OFFTIGHT  [STAND-OFF-TIGHT]  9.4,9.4 0 top
H2  STAND-OFFTIGHT  [STAND-OFF-TIGHT]  29.72,9.4 0 top
H3  STAND-OFFTIGHT  [STAND-OFF-TIGHT]  9.4,29.72 0 top
H4  STAND-OFFTIGHT  [STAND-OFF-TIGHT]  29.72,29.72 0 top
H5  STAND-OFFTIGHT  [STAND-OFF-TIGHT]  35.31,9.4 0 top
H6  STAND-OFFTIGHT  [STAND-OFF-TIGHT]  55.63,9.4 0 top
H7  STAND-OFFTIGHT  [STAND-OFF-TIGHT]  35.31,29.72 0 top
H8  STAND-OFFTIGHT  [STAND-OFF-TIGHT]  55.63,29.72 0 top
H9  STAND-OFFTIGHT  [STAND-OFF-TIGHT]  61.21,9.4 0 top
H10  STAND-OFFTIGHT  [STAND-OFF-TIGHT]  81.53,9.4 0 top
H11  STAND-OFFTIGHT  [STAND-OFF-TIGHT]  61.21,29.72 0 top
H12  STAND-OFFTIGHT  [STAND-OFF-TIGHT]  81.53,29.72 0 top
H13  STAND-OFFTIGHT  [STAND-OFF-TIGHT]  87.12,9.4 0 top
H14  STAND-OFFTIGHT  [STAND-OFF-TIGHT]  107.44,9.4 0 top
H15  STAND-OFFTIGHT  [STAND-OFF-TIGHT]  87.12,29.72 0 top
H16  STAND-OFFTIGHT  [STAND-OFF-TIGHT]  107.44,29.72 0 top
H17  STAND-OFFTIGHT  [STAND-OFF-TIGHT]  113.03,9.4 0 top
H18  STAND-OFFTIGHT  [STAND-OFF-TIGHT]  133.35,9.4 0 top
H19  STAND-OFFTIGHT  [STAND-OFF-TIGHT]  113.03,29.72 0 top
H20  STAND-OFFTIGHT  [STAND-OFF-TIGHT]  133.35,29.72 0 top
H21  STAND-OFFTIGHT  [STAND-OFF-TIGHT]  138.94,9.4 0 top
H22  STAND-OFFTIGHT  [STAND-OFF-TIGHT]  159.26,9.4 0 top
H23  STAND-OFFTIGHT  [STAND-OFF-TIGHT]  138.94,29.72 0 top
H24  STAND-OFFTIGHT  [STAND-OFF-TIGHT]  159.26,29.72 0 top
H25  STAND-OFFTIGHT  [STAND-OFF-TIGHT]  9.4,35.31 0 top
H26  STAND-OFFTIGHT  [STAND-OFF-TIGHT]  29.72,35.31 0 top
H27  STAND-OFFTIGHT  [STAND-OFF-TIGHT]  9.4,55.63 0 top
H28  STAND-OFFTIGHT  [STAND-OFF-TIGHT]  29.72,55.63 0 top
H29  STAND-OFFTIGHT  [STAND-OFF-TIGHT]  35.31,35.31 0 top
H30  STAND-OFFTIGHT  [STAND-OFF-TIGHT]  55.63,35.31 0 top
H31  STAND-OFFTIGHT  [STAND-OFF-TIGHT]  35.31,55.63 0 top
H32  STAND-OFFTIGHT  [STAND-OFF-TIGHT]  55.63,55.63 0 top
H33  STAND-OFFTIGHT  [STAND-OFF-TIGHT]  61.21,35.31 0 top
H34  STAND-OFFTIGHT  [STAND-OFF-TIGHT]  81.53,35.31 0 top
H35  STAND-OFFTIGHT  [STAND-OFF-TIGHT]  61.21,55.63 0 top
H36  STAND-OFFTIGHT  [STAND-OFF-TIGHT]  81.53,55.63 0 top
H37  STAND-OFFTIGHT  [STAND-OFF-TIGHT]  87.12,35.31 0 top
H38  STAND-OFFTIGHT  [STAND-OFF-TIGHT]  107.44,35.31 0 top
H39  STAND-OFFTIGHT  [STAND-OFF-TIGHT]  87.12,55.63 0 top
H40  STAND-OFFTIGHT  [STAND-OFF-TIGHT]  107.44,55.63 0 top
H41  STAND-OFFTIGHT  [STAND-OFF-TIGHT]  113.03,35.31 0 top
H42  STAND-OFFTIGHT  [STAND-OFF-TIGHT]  133.35,35.31 0 top
H43  STAND-OFFTIGHT  [STAND-OFF-TIGHT]  113.03,55.63 0 top
H44  STAND-OFFTIGHT  [STAND-OFF-TIGHT]  133.35,55.63 0 top
H45  STAND-OFFTIGHT  [STAND-OFF-TIGHT]  138.94,35.31 0 top
H46  STAND-OFFTIGHT  [STAND-OFF-TIGHT]  159.26,35.31 0 top
H47  STAND-OFFTIGHT  [STAND-OFF-TIGHT]  138.94,55.63 0 top
H48  STAND-OFFTIGHT  [STAND-OFF-TIGHT]  159.26,55.63 0 top
H49  STAND-OFFTIGHT  [STAND-OFF-TIGHT]  9.4,61.21 0 top
H50  STAND-OFFTIGHT  [STAND-OFF-TIGHT]  29.72,61.21 0 top
H51  STAND-OFFTIGHT  [STAND-OFF-TIGHT]  9.4,81.53 0 top
H52  STAND-OFFTIGHT  [STAND-OFF-TIGHT]  29.72,81.53 0 top
H53  STAND-OFFTIGHT  [STAND-OFF-TIGHT]  35.31,61.21 0 top
H54  STAND-OFFTIGHT  [STAND-OFF-TIGHT]  55.63,61.21 0 top
H55  STAND-OFFTIGHT  [STAND-OFF-TIGHT]  35.31,81.53 0 top
H56  STAND-OFFTIGHT  [STAND-OFF-TIGHT]  55.63,81.53 0 top
H57  STAND-OFFTIGHT  [STAND-OFF-TIGHT]  61.21,61.21 0 top
H58  STAND-OFFTIGHT  [STAND-OFF-TIGHT]  81.53,61.21 0 top
H59  STAND-OFFTIGHT  [STAND-OFF-TIGHT]  61.21,81.53 0 top
H60  STAND-OFFTIGHT  [STAND-OFF-TIGHT]  81.53,81.53 0 top
H61  STAND-OFFTIGHT  [STAND-OFF-TIGHT]  87.12,61.21 0 top
H62  STAND-OFFTIGHT  [STAND-OFF-TIGHT]  107.44,61.21 0 top
H63  STAND-OFFTIGHT  [STAND-OFF-TIGHT]  87.12,81.53 0 top
H64  STAND-OFFTIGHT  [STAND-OFF-TIGHT]  107.44,81.53 0 top
H65  STAND-OFFTIGHT  [STAND-OFF-TIGHT]  113.03,61.21 0 top
H66  STAND-OFFTIGHT  [STAND-OFF-TIGHT]  133.35,61.21 0 top
H67  STAND-OFFTIGHT  [STAND-OFF-TIGHT]  113.03,81.53 0 top
H68  STAND-OFFTIGHT  [STAND-OFF-TIGHT]  133.35,81.53 0 top
H69  STAND-OFFTIGHT  [STAND-OFF-TIGHT]  138.94,61.21 0 top
H70  STAND-OFFTIGHT  [STAND-OFF-TIGHT]  159.26,61.21 0 top
H71  STAND-OFFTIGHT  [STAND-OFF-TIGHT]  138.94,81.53 0 top
H72  STAND-OFFTIGHT  [STAND-OFF-TIGHT]  159.26,81.53 0 top
H73  STAND-OFFTIGHT  [STAND-OFF-TIGHT]  9.4,87.12 0 top
H74  STAND-OFFTIGHT  [STAND-OFF-TIGHT]  29.72,87.12 0 top
H75  STAND-OFFTIGHT  [STAND-OFF-TIGHT]  9.4,107.44 0 top
H76  STAND-OFFTIGHT  [STAND-OFF-TIGHT]  29.72,107.44 0 top
H77  STAND-OFFTIGHT  [STAND-OFF-TIGHT]  35.31,87.12 0 top
H78  STAND-OFFTIGHT  [STAND-OFF-TIGHT]  55.63,87.12 0 top
H79  STAND-OFFTIGHT  [STAND-OFF-TIGHT]  35.31,107.44 0 top
H80  STAND-OFFTIGHT  [STAND-OFF-TIGHT]  55.63,107.44 0 top
H81  STAND-OFFTIGHT  [STAND-OFF-TIGHT]  61.21,87.12 0 top
H82  STAND-OFFTIGHT  [STAND-OFF-TIGHT]  81.53,87.12 0 top
H83  STAND-OFFTIGHT  [STAND-OFF-TIGHT]  61.21,107.44 0 top
H84  STAND-OFFTIGHT  [STAND-OFF-TIGHT]  81.53,107.44 0 top
H85  STAND-OFFTIGHT  [STAND-OFF-TIGHT]  87.12,87.12 0 top
H86  STAND-OFFTIGHT  [STAND-OFF-TIGHT]  107.44,87.12 0 top
H87  STAND-OFFTIGHT  [STAND-OFF-TIGHT]  87.12,107.44 0 top
H88  STAND-OFFTIGHT  [STAND-OFF-TIGHT]  107.44,107.44 0 top
H89  STAND-OFFTIGHT  [STAND-OFF-TIGHT]  113.03,87.12 0 top
H90  STAND-OFFTIGHT  [STAND-OFF-TIGHT]  133.35,87.12 0 top
H91  STAND-OFFTIGHT  [STAND-OFF-TIGHT]  113.03,107.44 0 top
H92  STAND-OFFTIGHT  [STAND-OFF-TIGHT]  133.35,107.44 0 top
H93  STAND-OFFTIGHT  [STAND-OFF-TIGHT]  138.94,87.12 0 top
H94  STAND-OFFTIGHT  [STAND-OFF-TIGHT]  159.26,87.12 0 top
H95  STAND-OFFTIGHT  [STAND-OFF-TIGHT]  138.94,107.44 0 top
H96  STAND-OFFTIGHT  [STAND-OFF-TIGHT]  159.26,107.44 0 top
I2C  JUMPER-SMT_3_2-NC_TRACE_SILK  [SMT-JUMPER_3_2-NC_TRACE_SILK]  9.4,15.49 180 bottom
I2C1  JUMPER-SMT_3_2-NC_TRACE_SILK  [SMT-JUMPER_3_2-NC_TRACE_SILK]  35.31,15.49 180 bottom
I2C2  JUMPER-SMT_3_2-NC_TRACE_SILK  [SMT-JUMPER_3_2-NC_TRACE_SILK]  61.21,15.49 180 bottom
I2C3  JUMPER-SMT_3_2-NC_TRACE_SILK  [SMT-JUMPER_3_2-NC_TRACE_SILK]  87.12,15.49 180 bottom
I2C4  JUMPER-SMT_3_2-NC_TRACE_SILK  [SMT-JUMPER_3_2-NC_TRACE_SILK]  113.03,15.49 180 bottom
I2C5  JUMPER-SMT_3_2-NC_TRACE_SILK  [SMT-JUMPER_3_2-NC_TRACE_SILK]  138.94,15.49 180 bottom
I2C6  JUMPER-SMT_3_2-NC_TRACE_SILK  [SMT-JUMPER_3_2-NC_TRACE_SILK]  9.4,41.4 180 bottom
I2C7  JUMPER-SMT_3_2-NC_TRACE_SILK  [SMT-JUMPER_3_2-NC_TRACE_SILK]  35.31,41.4 180 bottom
I2C8  JUMPER-SMT_3_2-NC_TRACE_SILK  [SMT-JUMPER_3_2-NC_TRACE_SILK]  61.21,41.4 180 bottom
I2C9  JUMPER-SMT_3_2-NC_TRACE_SILK  [SMT-JUMPER_3_2-NC_TRACE_SILK]  87.12,41.4 180 bottom
I2C10  JUMPER-SMT_3_2-NC_TRACE_SILK  [SMT-JUMPER_3_2-NC_TRACE_SILK]  113.03,41.4 180 bottom
I2C11  JUMPER-SMT_3_2-NC_TRACE_SILK  [SMT-JUMPER_3_2-NC_TRACE_SILK]  138.94,41.4 180 bottom
I2C12  JUMPER-SMT_3_2-NC_TRACE_SILK  [SMT-JUMPER_3_2-NC_TRACE_SILK]  9.4,67.31 180 bottom
I2C13  JUMPER-SMT_3_2-NC_TRACE_SILK  [SMT-JUMPER_3_2-NC_TRACE_SILK]  35.31,67.31 180 bottom
I2C14  JUMPER-SMT_3_2-NC_TRACE_SILK  [SMT-JUMPER_3_2-NC_TRACE_SILK]  61.21,67.31 180 bottom
I2C15  JUMPER-SMT_3_2-NC_TRACE_SILK  [SMT-JUMPER_3_2-NC_TRACE_SILK]  87.12,67.31 180 bottom
I2C16  JUMPER-SMT_3_2-NC_TRACE_SILK  [SMT-JUMPER_3_2-NC_TRACE_SILK]  113.03,67.31 180 bottom
I2C17  JUMPER-SMT_3_2-NC_TRACE_SILK  [SMT-JUMPER_3_2-NC_TRACE_SILK]  138.94,67.31 180 bottom
I2C18  JUMPER-SMT_3_2-NC_TRACE_SILK  [SMT-JUMPER_3_2-NC_TRACE_SILK]  9.4,93.22 180 bottom
I2C19  JUMPER-SMT_3_2-NC_TRACE_SILK  [SMT-JUMPER_3_2-NC_TRACE_SILK]  35.31,93.22 180 bottom
I2C20  JUMPER-SMT_3_2-NC_TRACE_SILK  [SMT-JUMPER_3_2-NC_TRACE_SILK]  61.21,93.22 180 bottom
I2C21  JUMPER-SMT_3_2-NC_TRACE_SILK  [SMT-JUMPER_3_2-NC_TRACE_SILK]  87.12,93.22 180 bottom
I2C22  JUMPER-SMT_3_2-NC_TRACE_SILK  [SMT-JUMPER_3_2-NC_TRACE_SILK]  113.03,93.22 180 bottom
I2C23  JUMPER-SMT_3_2-NC_TRACE_SILK  [SMT-JUMPER_3_2-NC_TRACE_SILK]  138.94,93.22 180 bottom
J1  QWIIC_RA  [JST04_1MM_RA]  27.18,19.56 90 top
J2  QWIIC_RA  [JST04_1MM_RA]  11.94,19.56 270 top
J3  [1X06_NO_SILK]  25.91,8.13 180 top
J4  QWIIC_RA  [JST04_1MM_RA]  53.09,19.56 90 top
J5  QWIIC_RA  [JST04_1MM_RA]  37.85,19.56 270 top
J6  [1X06_NO_SILK]  51.82,8.13 180 top
J7  QWIIC_RA  [JST04_1MM_RA]  78.99,19.56 90 top
J8  QWIIC_RA  [JST04_1MM_RA]  63.75,19.56 270 top
J9  [1X06_NO_SILK]  77.72,8.13 180 top
J10  QWIIC_RA  [JST04_1MM_RA]  104.9,19.56 90 top
J11  QWIIC_RA  [JST04_1MM_RA]  89.66,19.56 270 top
J12  [1X06_NO_SILK]  103.63,8.13 180 top
J13  QWIIC_RA  [JST04_1MM_RA]  130.81,19.56 90 top
J14  QWIIC_RA  [JST04_1MM_RA]  115.57,19.56 270 top
J15  [1X06_NO_SILK]  129.54,8.13 180 top
J16  QWIIC_RA  [JST04_1MM_RA]  156.72,19.56 90 top
J17  QWIIC_RA  [JST04_1MM_RA]  141.48,19.56 270 top
J18  [1X06_NO_SILK]  155.45,8.13 180 top
J19  QWIIC_RA  [JST04_1MM_RA]  27.18,45.47 90 top
J20  QWIIC_RA  [JST04_1MM_RA]  11.94,45.47 270 top
J21  [1X06_NO_SILK]  25.91,34.04 180 top
J22  QWIIC_RA  [JST04_1MM_RA]  53.09,45.47 90 top
J23  QWIIC_RA  [JST04_1MM_RA]  37.85,45.47 270 top
J24  [1X06_NO_SILK]  51.82,34.04 180 top
J25  QWIIC_RA  [JST04_1MM_RA]  78.99,45.47 90 top
J26  QWIIC_RA  [JST04_1MM_RA]  63.75,45.47 270 top
J27  [1X06_NO_SILK]  77.72,34.04 180 top
J28  QWIIC_RA  [JST04_1MM_RA]  104.9,45.47 90 top
J29  QWIIC_RA  [JST04_1MM_RA]  89.66,45.47 270 top
J30  [1X06_NO_SILK]  103.63,34.04 180 top
J31  QWIIC_RA  [JST04_1MM_RA]  130.81,45.47 90 top
J32  QWIIC_RA  [JST04_1MM_RA]  115.57,45.47 270 top
J33  [1X06_NO_SILK]  129.54,34.04 180 top
J34  QWIIC_RA  [JST04_1MM_RA]  156.72,45.47 90 top
J35  QWIIC_RA  [JST04_1MM_RA]  141.48,45.47 270 top
J36  [1X06_NO_SILK]  155.45,34.04 180 top
J37  QWIIC_RA  [JST04_1MM_RA]  27.18,71.37 90 top
J38  QWIIC_RA  [JST04_1MM_RA]  11.94,71.37 270 top
J39  [1X06_NO_SILK]  25.91,59.94 180 top
J40  QWIIC_RA  [JST04_1MM_RA]  53.09,71.37 90 top
J41  QWIIC_RA  [JST04_1MM_RA]  37.85,71.37 270 top
J42  [1X06_NO_SILK]  51.82,59.94 180 top
J43  QWIIC_RA  [JST04_1MM_RA]  78.99,71.37 90 top
J44  QWIIC_RA  [JST04_1MM_RA]  63.75,71.37 270 top
J45  [1X06_NO_SILK]  77.72,59.94 180 top
J46  QWIIC_RA  [JST04_1MM_RA]  104.9,71.37 90 top
J47  QWIIC_RA  [JST04_1MM_RA]  89.66,71.37 270 top
J48  [1X06_NO_SILK]  103.63,59.94 180 top
J49  QWIIC_RA  [JST04_1MM_RA]  130.81,71.37 90 top
J50  QWIIC_RA  [JST04_1MM_RA]  115.57,71.37 270 top
J51  [1X06_NO_SILK]  129.54,59.94 180 top
J52  QWIIC_RA  [JST04_1MM_RA]  156.72,71.37 90 top
J53  QWIIC_RA  [JST04_1MM_RA]  141.48,71.37 270 top
J54  [1X06_NO_SILK]  155.45,59.94 180 top
J55  QWIIC_RA  [JST04_1MM_RA]  27.18,97.28 90 top
J56  QWIIC_RA  [JST04_1MM_RA]  11.94,97.28 270 top
J57  [1X06_NO_SILK]  25.91,85.85 180 top
J58  QWIIC_RA  [JST04_1MM_RA]  53.09,97.28 90 top
J59  QWIIC_RA  [JST04_1MM_RA]  37.85,97.28 270 top
J60  [1X06_NO_SILK]  51.82,85.85 180 top
J61  QWIIC_RA  [JST04_1MM_RA]  78.99,97.28 90 top
J62  QWIIC_RA  [JST04_1MM_RA]  63.75,97.28 270 top
J63  [1X06_NO_SILK]  77.72,85.85 180 top
J64  QWIIC_RA  [JST04_1MM_RA]  104.9,97.28 90 top
J65  QWIIC_RA  [JST04_1MM_RA]  89.66,97.28 270 top
J66  [1X06_NO_SILK]  103.63,85.85 180 top
J67  QWIIC_RA  [JST04_1MM_RA]  130.81,97.28 90 top
J68  QWIIC_RA  [JST04_1MM_RA]  115.57,97.28 270 top
J69  [1X06_NO_SILK]  129.54,85.85 180 top
J70  QWIIC_RA  [JST04_1MM_RA]  156.72,97.28 90 top
J71  QWIIC_RA  [JST04_1MM_RA]  141.48,97.28 270 top
J72  [1X06_NO_SILK]  155.45,85.85 180 top
LOGO1  SFE_LOGO_NAME_FLAME.1_INCH  [SFE_LOGO_NAME_FLAME_.1]  19.56,19.56 0 bottom
LOGO2  QWIIC_LOGO_CONNECTOR  [QWIIC_5.5MM]  9.91,24.64 0 top
LOGO3  OSHW-LOGOMINI  [OSHW-LOGO-MINI]  29.72,14.48 0 top
LOGO4  SFE_LOGO_NAME_FLAME.1_INCH  [SFE_LOGO_NAME_FLAME_.1]  45.47,19.56 0 bottom
LOGO5  QWIIC_LOGO_CONNECTOR  [QWIIC_5.5MM]  35.81,24.64 0 top
LOGO6  OSHW-LOGOMINI  [OSHW-LOGO-MINI]  55.63,14.48 0 top
LOGO7  SFE_LOGO_NAME_FLAME.1_INCH  [SFE_LOGO_NAME_FLAME_.1]  71.37,19.56 0 bottom
LOGO8  QWIIC_LOGO_CONNECTOR  [QWIIC_5.5MM]  61.72,24.64 0 top
LOGO9  OSHW-LOGOMINI  [OSHW-LOGO-MINI]  81.53,14.48 0 top
LOGO10  SFE_LOGO_NAME_FLAME.1_INCH  [SFE_LOGO_NAME_FLAME_.1]  97.28,19.56 0 bottom
LOGO11  QWIIC_LOGO_CONNECTOR  [QWIIC_5.5MM]  87.63,24.64 0 top
LOGO12  OSHW-LOGOMINI  [OSHW-LOGO-MINI]  107.44,14.48 0 top
LOGO13  SFE_LOGO_NAME_FLAME.1_INCH  [SFE_LOGO_NAME_FLAME_.1]  123.19,19.56 0 bottom
LOGO14  QWIIC_LOGO_CONNECTOR  [QWIIC_5.5MM]  113.54,24.64 0 top
LOGO15  OSHW-LOGOMINI  [OSHW-LOGO-MINI]  133.35,14.48 0 top
LOGO16  SFE_LOGO_NAME_FLAME.1_INCH  [SFE_LOGO_NAME_FLAME_.1]  149.1,19.56 0 bottom
LOGO17  QWIIC_LOGO_CONNECTOR  [QWIIC_5.5MM]  139.45,24.64 0 top
LOGO18  OSHW-LOGOMINI  [OSHW-LOGO-MINI]  159.26,14.48 0 top
LOGO19  SFE_LOGO_NAME_FLAME.1_INCH  [SFE_LOGO_NAME_FLAME_.1]  19.56,45.47 0 bottom
LOGO20  QWIIC_LOGO_CONNECTOR  [QWIIC_5.5MM]  9.91,50.55 0 top
LOGO21  OSHW-LOGOMINI  [OSHW-LOGO-MINI]  29.72,40.39 0 top
LOGO22  SFE_LOGO_NAME_FLAME.1_INCH  [SFE_LOGO_NAME_FLAME_.1]  45.47,45.47 0 bottom
LOGO23  QWIIC_LOGO_CONNECTOR  [QWIIC_5.5MM]  35.81,50.55 0 top
LOGO24  OSHW-LOGOMINI  [OSHW-LOGO-MINI]  55.63,40.39 0 top
LOGO25  SFE_LOGO_NAME_FLAME.1_INCH  [SFE_LOGO_NAME_FLAME_.1]  71.37,45.47 0 bottom
LOGO26  QWIIC_LOGO_CONNECTOR  [QWIIC_5.5MM]  61.72,50.55 0 top
LOGO27  OSHW-LOGOMINI  [OSHW-LOGO-MINI]  81.53,40.39 0 top
LOGO28  SFE_LOGO_NAME_FLAME.1_INCH  [SFE_LOGO_NAME_FLAME_.1]  97.28,45.47 0 bottom
LOGO29  QWIIC_LOGO_CONNECTOR  [QWIIC_5.5MM]  87.63,50.55 0 top
LOGO30  OSHW-LOGOMINI  [OSHW-LOGO-MINI]  107.44,40.39 0 top
LOGO31  SFE_LOGO_NAME_FLAME.1_INCH  [SFE_LOGO_NAME_FLAME_.1]  123.19,45.47 0 bottom
LOGO32  QWIIC_LOGO_CONNECTOR  [QWIIC_5.5MM]  113.54,50.55 0 top
LOGO33  OSHW-LOGOMINI  [OSHW-LOGO-MINI]  133.35,40.39 0 top
LOGO34  SFE_LOGO_NAME_FLAME.1_INCH  [SFE_LOGO_NAME_FLAME_.1]  149.1,45.47 0 bottom
LOGO35  QWIIC_LOGO_CONNECTOR  [QWIIC_5.5MM]  139.45,50.55 0 top
LOGO36  OSHW-LOGOMINI  [OSHW-LOGO-MINI]  159.26,40.39 0 top
LOGO37  SFE_LOGO_NAME_FLAME.1_INCH  [SFE_LOGO_NAME_FLAME_.1]  19.56,71.37 0 bottom
LOGO38  QWIIC_LOGO_CONNECTOR  [QWIIC_5.5MM]  9.91,76.45 0 top
LOGO39  OSHW-LOGOMINI  [OSHW-LOGO-MINI]  29.72,66.29 0 top
LOGO40  SFE_LOGO_NAME_FLAME.1_INCH  [SFE_LOGO_NAME_FLAME_.1]  45.47,71.37 0 bottom
LOGO41  QWIIC_LOGO_CONNECTOR  [QWIIC_5.5MM]  35.81,76.45 0 top
LOGO42  OSHW-LOGOMINI  [OSHW-LOGO-MINI]  55.63,66.29 0 top
LOGO43  SFE_LOGO_NAME_FLAME.1_INCH  [SFE_LOGO_NAME_FLAME_.1]  71.37,71.37 0 bottom
LOGO44  QWIIC_LOGO_CONNECTOR  [QWIIC_5.5MM]  61.72,76.45 0 top
LOGO45  OSHW-LOGOMINI  [OSHW-LOGO-MINI]  81.53,66.29 0 top
LOGO46  SFE_LOGO_NAME_FLAME.1_INCH  [SFE_LOGO_NAME_FLAME_.1]  97.28,71.37 0 bottom
LOGO47  QWIIC_LOGO_CONNECTOR  [QWIIC_5.5MM]  87.63,76.45 0 top
LOGO48  OSHW-LOGOMINI  [OSHW-LOGO-MINI]  107.44,66.29 0 top
LOGO49  SFE_LOGO_NAME_FLAME.1_INCH  [SFE_LOGO_NAME_FLAME_.1]  123.19,71.37 0 bottom
LOGO50  QWIIC_LOGO_CONNECTOR  [QWIIC_5.5MM]  113.54,76.45 0 top
LOGO51  OSHW-LOGOMINI  [OSHW-LOGO-MINI]  133.35,66.29 0 top
LOGO52  SFE_LOGO_NAME_FLAME.1_INCH  [SFE_LOGO_NAME_FLAME_.1]  149.1,71.37 0 bottom
LOGO53  QWIIC_LOGO_CONNECTOR  [QWIIC_5.5MM]  139.45,76.45 0 top
LOGO54  OSHW-LOGOMINI  [OSHW-LOGO-MINI]  159.26,66.29 0 top
LOGO55  SFE_LOGO_NAME_FLAME.1_INCH  [SFE_LOGO_NAME_FLAME_.1]  19.56,97.28 0 bottom
LOGO56  QWIIC_LOGO_CONNECTOR  [QWIIC_5.5MM]  9.91,102.36 0 top
LOGO57  OSHW-LOGOMINI  [OSHW-LOGO-MINI]  29.72,92.2 0 top
LOGO58  SFE_LOGO_NAME_FLAME.1_INCH  [SFE_LOGO_NAME_FLAME_.1]  45.47,97.28 0 bottom
LOGO59  QWIIC_LOGO_CONNECTOR  [QWIIC_5.5MM]  35.81,102.36 0 top
LOGO60  OSHW-LOGOMINI  [OSHW-LOGO-MINI]  55.63,92.2 0 top
LOGO61  SFE_LOGO_NAME_FLAME.1_INCH  [SFE_LOGO_NAME_FLAME_.1]  71.37,97.28 0 bottom
LOGO62  QWIIC_LOGO_CONNECTOR  [QWIIC_5.5MM]  61.72,102.36 0 top
LOGO63  OSHW-LOGOMINI  [OSHW-LOGO-MINI]  81.53,92.2 0 top
LOGO64  SFE_LOGO_NAME_FLAME.1_INCH  [SFE_LOGO_NAME_FLAME_.1]  97.28,97.28 0 bottom
LOGO65  QWIIC_LOGO_CONNECTOR  [QWIIC_5.5MM]  87.63,102.36 0 top
LOGO66  OSHW-LOGOMINI  [OSHW-LOGO-MINI]  107.44,92.2 0 top
LOGO67  SFE_LOGO_NAME_FLAME.1_INCH  [SFE_LOGO_NAME_FLAME_.1]  123.19,97.28 0 bottom
LOGO68  QWIIC_LOGO_CONNECTOR  [QWIIC_5.5MM]  113.54,102.36 0 top
LOGO69  OSHW-LOGOMINI  [OSHW-LOGO-MINI]  133.35,92.2 0 top
LOGO70  SFE_LOGO_NAME_FLAME.1_INCH  [SFE_LOGO_NAME_FLAME_.1]  149.1,97.28 0 bottom
LOGO71  QWIIC_LOGO_CONNECTOR  [QWIIC_5.5MM]  139.45,102.36 0 top
LOGO72  OSHW-LOGOMINI  [OSHW-LOGO-MINI]  159.26,92.2 0 top
PWR  JUMPER-SMT_2_NC_TRACE_SILK  [SMT-JUMPER_2_NC_TRACE_SILK]  29.84,22.35 270 bottom
PWR1  JUMPER-SMT_2_NC_TRACE_SILK  [SMT-JUMPER_2_NC_TRACE_SILK]  55.75,22.35 270 bottom
PWR2  JUMPER-SMT_2_NC_TRACE_SILK  [SMT-JUMPER_2_NC_TRACE_SILK]  81.66,22.35 270 bottom
PWR3  JUMPER-SMT_2_NC_TRACE_SILK  [SMT-JUMPER_2_NC_TRACE_SILK]  107.57,22.35 270 bottom
PWR4  JUMPER-SMT_2_NC_TRACE_SILK  [SMT-JUMPER_2_NC_TRACE_SILK]  133.48,22.35 270 bottom
PWR5  JUMPER-SMT_2_NC_TRACE_SILK  [SMT-JUMPER_2_NC_TRACE_SILK]  159.38,22.35 270 bottom
PWR6  JUMPER-SMT_2_NC_TRACE_SILK  [SMT-JUMPER_2_NC_TRACE_SILK]  29.84,48.26 270 bottom
PWR7  JUMPER-SMT_2_NC_TRACE_SILK  [SMT-JUMPER_2_NC_TRACE_SILK]  55.75,48.26 270 bottom
PWR8  JUMPER-SMT_2_NC_TRACE_SILK  [SMT-JUMPER_2_NC_TRACE_SILK]  81.66,48.26 270 bottom
PWR9  JUMPER-SMT_2_NC_TRACE_SILK  [SMT-JUMPER_2_NC_TRACE_SILK]  107.57,48.26 270 bottom
PWR10  JUMPER-SMT_2_NC_TRACE_SILK  [SMT-JUMPER_2_NC_TRACE_SILK]  133.48,48.26 270 bottom
PWR11  JUMPER-SMT_2_NC_TRACE_SILK  [SMT-JUMPER_2_NC_TRACE_SILK]  159.38,48.26 270 bottom
PWR12  JUMPER-SMT_2_NC_TRACE_SILK  [SMT-JUMPER_2_NC_TRACE_SILK]  29.84,74.17 270 bottom
PWR13  JUMPER-SMT_2_NC_TRACE_SILK  [SMT-JUMPER_2_NC_TRACE_SILK]  55.75,74.17 270 bottom
PWR14  JUMPER-SMT_2_NC_TRACE_SILK  [SMT-JUMPER_2_NC_TRACE_SILK]  81.66,74.17 270 bottom
PWR15  JUMPER-SMT_2_NC_TRACE_SILK  [SMT-JUMPER_2_NC_TRACE_SILK]  107.57,74.17 270 bottom
PWR16  JUMPER-SMT_2_NC_TRACE_SILK  [SMT-JUMPER_2_NC_TRACE_SILK]  133.48,74.17 270 bottom
PWR17  JUMPER-SMT_2_NC_TRACE_SILK  [SMT-JUMPER_2_NC_TRACE_SILK]  159.38,74.17 270 bottom
PWR18  JUMPER-SMT_2_NC_TRACE_SILK  [SMT-JUMPER_2_NC_TRACE_SILK]  29.84,100.08 270 bottom
PWR19  JUMPER-SMT_2_NC_TRACE_SILK  [SMT-JUMPER_2_NC_TRACE_SILK]  55.75,100.08 270 bottom
PWR20  JUMPER-SMT_2_NC_TRACE_SILK  [SMT-JUMPER_2_NC_TRACE_SILK]  81.66,100.08 270 bottom
PWR21  JUMPER-SMT_2_NC_TRACE_SILK  [SMT-JUMPER_2_NC_TRACE_SILK]  107.57,100.08 270 bottom
PWR22  JUMPER-SMT_2_NC_TRACE_SILK  [SMT-JUMPER_2_NC_TRACE_SILK]  133.48,100.08 270 bottom
PWR23  JUMPER-SMT_2_NC_TRACE_SILK  [SMT-JUMPER_2_NC_TRACE_SILK]  159.38,100.08 270 bottom
R1  2.2k  [0402-TIGHT]  10.54,14.73 270 top
R2  2.2k  [0402-TIGHT]  8.51,14.73 270 top
R3  10K  [0402-TIGHT]  22.61,23.34 270 top
R4  10K  [0402-TIGHT]  16.51,23.37 270 top
R5  2.2k  [0402-TIGHT]  27.3,25.15 90 top
R6  10Ω  [0402-TIGHT]  14.48,19.81 0 top
R7  3.3M  [1206]  19.56,29.72 180 top
R8  2.2k  [0402-TIGHT]  36.45,14.73 270 top
R9  2.2k  [0402-TIGHT]  34.42,14.73 270 top
R10  10K  [0402-TIGHT]  48.51,23.34 270 top
R11  10K  [0402-TIGHT]  42.42,23.37 270 top
R12  2.2k  [0402-TIGHT]  53.21,25.15 90 top
R13  3.3M  [1206]  45.47,29.72 180 top
R14  10Ω  [0402-TIGHT]  40.39,19.81 0 top
R15  2.2k  [0402-TIGHT]  62.36,14.73 270 top
R16  2.2k  [0402-TIGHT]  60.32,14.73 270 top
R17  10K  [0402-TIGHT]  74.42,23.34 270 top
R18  10K  [0402-TIGHT]  68.33,23.37 270 top
R19  2.2k  [0402-TIGHT]  79.12,25.15 90 top
R20  3.3M  [1206]  71.37,29.72 180 top
R21  10Ω  [0402-TIGHT]  66.29,19.81 0 top
R22  2.2k  [0402-TIGHT]  88.27,14.73 270 top
R23  2.2k  [0402-TIGHT]  86.23,14.73 270 top
R24  10K  [0402-TIGHT]  100.33,23.34 270 top
R25  10K  [0402-TIGHT]  94.23,23.37 270 top
R26  2.2k  [0402-TIGHT]  105.03,25.15 90 top
R27  3.3M  [1206]  97.28,29.72 180 top
R28  10Ω  [0402-TIGHT]  92.2,19.81 0 top
R29  2.2k  [0402-TIGHT]  114.17,14.73 270 top
R30  2.2k  [0402-TIGHT]  112.14,14.73 270 top
R31  10K  [0402-TIGHT]  126.24,23.34 270 top
R32  10K  [0402-TIGHT]  120.14,23.37 270 top
R33  2.2k  [0402-TIGHT]  130.94,25.15 90 top
R34  3.3M  [1206]  123.19,29.72 180 top
R35  10Ω  [0402-TIGHT]  118.11,19.81 0 top
R36  2.2k  [0402-TIGHT]  140.08,14.73 270 top
R37  2.2k  [0402-TIGHT]  138.05,14.73 270 top
R38  10K  [0402-TIGHT]  152.15,23.34 270 top
R39  10K  [0402-TIGHT]  146.05,23.37 270 top
R40  2.2k  [0402-TIGHT]  156.84,25.15 90 top
R41  3.3M  [1206]  149.1,29.72 180 top
R42  10Ω  [0402-TIGHT]  144.02,19.81 0 top
R43  2.2k  [0402-TIGHT]  10.54,40.64 270 top
R44  2.2k  [0402-TIGHT]  8.51,40.64 270 top
R45  10K  [0402-TIGHT]  22.61,49.25 270 top
R46  10K  [0402-TIGHT]  16.51,49.28 270 top
R47  2.2k  [0402-TIGHT]  27.3,51.05 90 top
R48  3.3M  [1206]  19.56,55.63 180 top
R49  10Ω  [0402-TIGHT]  14.48,45.72 0 top
R50  2.2k  [0402-TIGHT]  36.45,40.64 270 top
R51  2.2k  [0402-TIGHT]  34.42,40.64 270 top
R52  10K  [0402-TIGHT]  48.51,49.25 270 top
R53  10K  [0402-TIGHT]  42.42,49.28 270 top
R54  2.2k  [0402-TIGHT]  53.21,51.05 90 top
R55  3.3M  [1206]  45.47,55.63 180 top
R56  10Ω  [0402-TIGHT]  40.39,45.72 0 top
R57  2.2k  [0402-TIGHT]  62.36,40.64 270 top
R58  2.2k  [0402-TIGHT]  60.32,40.64 270 top
R59  10K  [0402-TIGHT]  74.42,49.25 270 top
R60  10K  [0402-TIGHT]  68.33,49.28 270 top
R61  2.2k  [0402-TIGHT]  79.12,51.05 90 top
R62  3.3M  [1206]  71.37,55.63 180 top
R63  10Ω  [0402-TIGHT]  66.29,45.72 0 top
R64  2.2k  [0402-TIGHT]  88.27,40.64 270 top
R65  2.2k  [0402-TIGHT]  86.23,40.64 270 top
R66  10K  [0402-TIGHT]  100.33,49.25 270 top
R67  10K  [0402-TIGHT]  94.23,49.28 270 top
R68  2.2k  [0402-TIGHT]  105.03,51.05 90 top
R69  3.3M  [1206]  97.28,55.63 180 top
R70  10Ω  [0402-TIGHT]  92.2,45.72 0 top
R71  2.2k  [0402-TIGHT]  114.17,40.64 270 top
R72  2.2k  [0402-TIGHT]  112.14,40.64 270 top
R73  10K  [0402-TIGHT]  126.24,49.25 270 top
R74  10K  [0402-TIGHT]  120.14,49.28 270 top
R75  2.2k  [0402-TIGHT]  130.94,51.05 90 top
R76  3.3M  [1206]  123.19,55.63 180 top
R77  10Ω  [0402-TIGHT]  118.11,45.72 0 top
R78  2.2k  [0402-TIGHT]  140.08,40.64 270 top
R79  2.2k  [0402-TIGHT]  138.05,40.64 270 top
R80  10K  [0402-TIGHT]  152.15,49.25 270 top
R81  10K  [0402-TIGHT]  146.05,49.28 270 top
R82  2.2k  [0402-TIGHT]  156.84,51.05 90 top
R83  3.3M  [1206]  149.1,55.63 180 top
R84  10Ω  [0402-TIGHT]  144.02,45.72 0 top
R85  2.2k  [0402-TIGHT]  10.54,66.55 270 top
R86  2.2k  [0402-TIGHT]  8.51,66.55 270 top
R87  10K  [0402-TIGHT]  22.61,75.16 270 top
R88  10K  [0402-TIGHT]  16.51,75.18 270 top
R89  2.2k  [0402-TIGHT]  27.3,76.96 90 top
R90  3.3M  [1206]  19.56,81.53 180 top
R91  10Ω  [0402-TIGHT]  14.48,71.63 0 top
R92  2.2k  [0402-TIGHT]  36.45,66.55 270 top
R93  2.2k  [0402-TIGHT]  34.42,66.55 270 top
R94  10K  [0402-TIGHT]  48.51,75.16 270 top
R95  10K  [0402-TIGHT]  42.42,75.18 270 top
R96  2.2k  [0402-TIGHT]  53.21,76.96 90 top
R97  3.3M  [1206]  45.47,81.53 180 top
R98  10Ω  [0402-TIGHT]  40.39,71.63 0 top
R99  2.2k  [0402-TIGHT]  62.36,66.55 270 top
R100  2.2k  [0402-TIGHT]  60.32,66.55 270 top
R101  10K  [0402-TIGHT]  74.42,75.16 270 top
R102  10K  [0402-TIGHT]  68.33,75.18 270 top
R103  2.2k  [0402-TIGHT]  79.12,76.96 90 top
R104  3.3M  [1206]  71.37,81.53 180 top
R105  10Ω  [0402-TIGHT]  66.29,71.63 0 top
R106  2.2k  [0402-TIGHT]  88.27,66.55 270 top
R107  2.2k  [0402-TIGHT]  86.23,66.55 270 top
R108  10K  [0402-TIGHT]  100.33,75.16 270 top
R109  10K  [0402-TIGHT]  94.23,75.18 270 top
R110  2.2k  [0402-TIGHT]  105.03,76.96 90 top
R111  3.3M  [1206]  97.28,81.53 180 top
R112  10Ω  [0402-TIGHT]  92.2,71.63 0 top
R113  2.2k  [0402-TIGHT]  114.17,66.55 270 top
R114  2.2k  [0402-TIGHT]  112.14,66.55 270 top
R115  10K  [0402-TIGHT]  126.24,75.16 270 top
R116  10K  [0402-TIGHT]  120.14,75.18 270 top
R117  2.2k  [0402-TIGHT]  130.94,76.96 90 top
R118  3.3M  [1206]  123.19,81.53 180 top
R119  10Ω  [0402-TIGHT]  118.11,71.63 0 top
R120  2.2k  [0402-TIGHT]  140.08,66.55 270 top
R121  2.2k  [0402-TIGHT]  138.05,66.55 270 top
R122  10K  [0402-TIGHT]  152.15,75.16 270 top
R123  10K  [0402-TIGHT]  146.05,75.18 270 top
R124  2.2k  [0402-TIGHT]  156.84,76.96 90 top
R125  3.3M  [1206]  149.1,81.53 180 top
R126  10Ω  [0402-TIGHT]  144.02,71.63 0 top
R127  2.2k  [0402-TIGHT]  10.54,92.46 270 top
R128  2.2k  [0402-TIGHT]  8.51,92.46 270 top
R129  10K  [0402-TIGHT]  22.61,101.07 270 top
R130  10K  [0402-TIGHT]  16.51,101.09 270 top
R131  2.2k  [0402-TIGHT]  27.3,102.87 90 top
R132  3.3M  [1206]  19.56,107.44 180 top
R133  10Ω  [0402-TIGHT]  14.48,97.54 0 top
R134  2.2k  [0402-TIGHT]  36.45,92.46 270 top
R135  2.2k  [0402-TIGHT]  34.42,92.46 270 top
R136  10K  [0402-TIGHT]  48.51,101.07 270 top
R137  10K  [0402-TIGHT]  42.42,101.09 270 top
R138  2.2k  [0402-TIGHT]  53.21,102.87 90 top
R139  3.3M  [1206]  45.47,107.44 180 top
R140  10Ω  [0402-TIGHT]  40.39,97.54 0 top
R141  2.2k  [0402-TIGHT]  62.36,92.46 270 top
R142  2.2k  [0402-TIGHT]  60.32,92.46 270 top
R143  10K  [0402-TIGHT]  74.42,101.07 270 top
R144  10K  [0402-TIGHT]  68.33,101.09 270 top
R145  2.2k  [0402-TIGHT]  79.12,102.87 90 top
R146  3.3M  [1206]  71.37,107.44 180 top
R147  10Ω  [0402-TIGHT]  66.29,97.54 0 top
R148  2.2k  [0402-TIGHT]  88.27,92.46 270 top
R149  2.2k  [0402-TIGHT]  86.23,92.46 270 top
R150  10K  [0402-TIGHT]  100.33,101.07 270 top
R151  10K  [0402-TIGHT]  94.23,101.09 270 top
R152  2.2k  [0402-TIGHT]  105.03,102.87 90 top
R153  3.3M  [1206]  97.28,107.44 180 top
R154  10Ω  [0402-TIGHT]  92.2,97.54 0 top
R155  2.2k  [0402-TIGHT]  114.17,92.46 270 top
R156  2.2k  [0402-TIGHT]  112.14,92.46 270 top
R157  10K  [0402-TIGHT]  126.24,101.07 270 top
R158  10K  [0402-TIGHT]  120.14,101.09 270 top
R159  2.2k  [0402-TIGHT]  130.94,102.87 90 top
R160  3.3M  [1206]  123.19,107.44 180 top
R161  10Ω  [0402-TIGHT]  118.11,97.54 0 top
R162  2.2k  [0402-TIGHT]  140.08,92.46 270 top
R163  2.2k  [0402-TIGHT]  138.05,92.46 270 top
R164  10K  [0402-TIGHT]  152.15,101.07 270 top
R165  10K  [0402-TIGHT]  146.05,101.09 270 top
R166  2.2k  [0402-TIGHT]  156.84,102.87 90 top
R167  3.3M  [1206]  149.1,107.44 180 top
R168  10Ω  [0402-TIGHT]  144.02,97.54 0 top
SUPPLYTIE1  2PT_GND_TIE  [2PT_GND_TIE]  17.14,21.34 270 bottom
SUPPLYTIE2  2PT_GND_TIE  [2PT_GND_TIE]  43.05,21.34 270 bottom
SUPPLYTIE3  2PT_GND_TIE  [2PT_GND_TIE]  68.96,21.34 270 bottom
SUPPLYTIE4  2PT_GND_TIE  [2PT_GND_TIE]  94.87,21.34 270 bottom
SUPPLYTIE5  2PT_GND_TIE  [2PT_GND_TIE]  120.78,21.34 270 bottom
SUPPLYTIE6  2PT_GND_TIE  [2PT_GND_TIE]  146.69,21.34 270 bottom
SUPPLYTIE7  2PT_GND_TIE  [2PT_GND_TIE]  17.14,47.24 270 bottom
SUPPLYTIE8  2PT_GND_TIE  [2PT_GND_TIE]  43.05,47.24 270 bottom
SUPPLYTIE9  2PT_GND_TIE  [2PT_GND_TIE]  68.96,47.24 270 bottom
SUPPLYTIE10  2PT_GND_TIE  [2PT_GND_TIE]  94.87,47.24 270 bottom
SUPPLYTIE11  2PT_GND_TIE  [2PT_GND_TIE]  120.78,47.24 270 bottom
SUPPLYTIE12  2PT_GND_TIE  [2PT_GND_TIE]  146.69,47.24 270 bottom
SUPPLYTIE13  2PT_GND_TIE  [2PT_GND_TIE]  17.14,73.15 270 bottom
SUPPLYTIE14  2PT_GND_TIE  [2PT_GND_TIE]  43.05,73.15 270 bottom
SUPPLYTIE15  2PT_GND_TIE  [2PT_GND_TIE]  68.96,73.15 270 bottom
SUPPLYTIE16  2PT_GND_TIE  [2PT_GND_TIE]  94.87,73.15 270 bottom
SUPPLYTIE17  2PT_GND_TIE  [2PT_GND_TIE]  120.78,73.15 270 bottom
SUPPLYTIE18  2PT_GND_TIE  [2PT_GND_TIE]  146.69,73.15 270 bottom
SUPPLYTIE19  2PT_GND_TIE  [2PT_GND_TIE]  17.14,99.06 270 bottom
SUPPLYTIE20  2PT_GND_TIE  [2PT_GND_TIE]  43.05,99.06 270 bottom
SUPPLYTIE21  2PT_GND_TIE  [2PT_GND_TIE]  68.96,99.06 270 bottom
SUPPLYTIE22  2PT_GND_TIE  [2PT_GND_TIE]  94.87,99.06 270 bottom
SUPPLYTIE23  2PT_GND_TIE  [2PT_GND_TIE]  120.78,99.06 270 bottom
SUPPLYTIE24  2PT_GND_TIE  [2PT_GND_TIE]  146.69,99.06 270 bottom
U1  AS7331  [OLGA16]  19.56,19.56 90 top
U2  AS7331  [OLGA16]  45.47,19.56 90 top
U3  AS7331  [OLGA16]  71.37,19.56 90 top
U4  AS7331  [OLGA16]  97.28,19.56 90 top
U5  AS7331  [OLGA16]  123.19,19.56 90 top
U6  AS7331  [OLGA16]  149.1,19.56 90 top
U7  AS7331  [OLGA16]  19.56,45.47 90 top
U8  AS7331  [OLGA16]  45.47,45.47 90 top
U9  AS7331  [OLGA16]  71.37,45.47 90 top
U10  AS7331  [OLGA16]  97.28,45.47 90 top
U11  AS7331  [OLGA16]  123.19,45.47 90 top
U12  AS7331  [OLGA16]  149.1,45.47 90 top
U13  AS7331  [OLGA16]  19.56,71.37 90 top
U14  AS7331  [OLGA16]  45.47,71.37 90 top
U15  AS7331  [OLGA16]  71.37,71.37 90 top
U16  AS7331  [OLGA16]  97.28,71.37 90 top
U17  AS7331  [OLGA16]  123.19,71.37 90 top
U18  AS7331  [OLGA16]  149.1,71.37 90 top
U19  AS7331  [OLGA16]  19.56,97.28 90 top
U20  AS7331  [OLGA16]  45.47,97.28 90 top
U21  AS7331  [OLGA16]  71.37,97.28 90 top
U22  AS7331  [OLGA16]  97.28,97.28 90 top
U23  AS7331  [OLGA16]  123.19,97.28 90 top
U24  AS7331  [OLGA16]  149.1,97.28 90 top
U$1  [PWR0]  55.75,25.78 0 top
U$2  [#_SCL#0]  39.12,8.38 90 bottom
U$3  [#_SDA#0]  41.66,8.38 90 bottom
U$4  [#_3V3#0]  44.2,8.38 90 bottom
U$5  [#_GND#0]  46.74,8.38 90 bottom
U$6  [#PWR#0]  29.84,21.53 90 bottom
U$7  [SFE_LOGO_FLAME_STOP_.1]  13.08,30.48 0 top
U$8  [SPECTRAL_UV_SENSOR0]  19.56,15.75 0 bottom
U$9  [#A0#0]  26.54,25.91 0 bottom
U$10  [PWR0]  29.84,25.78 0 top
U$11  [#_SCL#0]  13.21,8.38 90 bottom
U$12  [#_SDA#0]  15.75,8.38 90 bottom
U$13  [#_3V3#0]  18.29,8.38 90 bottom
U$14  [#_GND#0]  20.83,8.38 90 bottom
U$15  [#_INT#0]  23.37,8.38 90 bottom
U$16  [#_#SYN##0]  25.91,8.38 90 top
U$17  [#_SCL#0]  13.21,8.38 90 top
U$18  [#_SDA#0]  15.75,8.38 90 top
U$19  [#_3V3#0]  18.29,8.38 90 top
U$20  [#_GND#0]  20.83,8.38 90 top
U$21  [#_INT#0]  23.37,8.38 90 top
U$22  [SFE_LOGO_NAME_.1]  19.56,25.27 0 top
U$23  [#_INT#0]  49.28,8.38 90 bottom
U$24  [#A1#0]  12.57,25.91 0 bottom
U$25  [AS73310]  19.56,13.97 0 bottom
U$26  [#I�C#0]  9.4,17.14 0 bottom
U$27  [#_#SYN##0]  25.91,8.38 90 bottom
U$28  [AS73310]  19.56,13.97 0 top
U$29  [SPECTRAL_UV_SENSOR0]  19.56,15.75 0 top
U$30  [#0#0]  11.94,27.3 270 bottom
U$31  [#0#0]  27.18,27.3 270 bottom
U$32  [#1#0]  11.94,24.51 90 bottom
U$33  [#1#0]  27.18,24.51 90 bottom
U$34  [#_SCL#0]  39.12,8.38 90 top
U$35  [#_SDA#0]  41.66,8.38 90 top
U$36  [#_3V3#0]  44.2,8.38 90 top
U$37  [#_GND#0]  46.74,8.38 90 top
U$38  [#_INT#0]  49.28,8.38 90 top
U$39  [#PWR#0]  55.75,21.53 90 bottom
U$40  [SFE_LOGO_FLAME_STOP_.1]  38.99,30.48 0 top
U$41  [AS73310]  45.47,13.97 0 bottom
U$42  [#I�C#0]  35.31,17.14 0 bottom
U$43  [#A0#0]  52.45,25.91 0 bottom
U$44  [SPECTRAL_UV_SENSOR0]  45.47,15.75 0 bottom
U$45  [#_#SYN##0]  51.82,8.38 90 bottom
U$46  [#_#SYN##0]  51.82,8.38 90 top
U$47  [SFE_LOGO_NAME_.1]  45.47,25.27 0 top
U$48  [AS73310]  45.47,13.97 0 top
U$49  [SPECTRAL_UV_SENSOR0]  45.47,15.75 0 top
U$50  [#A1#0]  38.48,25.91 0 bottom
U$51  [#0#0]  37.85,27.3 270 bottom
U$52  [#0#0]  53.09,27.3 270 bottom
U$53  [#1#0]  37.85,24.51 90 bottom
U$54  [#1#0]  53.09,24.51 90 bottom
U$55  [PWR0]  81.66,25.78 0 top
U$56  [#_SCL#0]  65.02,8.38 90 bottom
U$57  [#_SDA#0]  67.56,8.38 90 bottom
U$58  [#_3V3#0]  70.1,8.38 90 bottom
U$59  [#_GND#0]  72.64,8.38 90 bottom
U$60  [#_INT#0]  75.18,8.38 90 bottom
U$61  [#_SCL#0]  65.02,8.38 90 top
U$62  [#_SDA#0]  67.56,8.38 90 top
U$63  [#_3V3#0]  70.1,8.38 90 top
U$64  [#_GND#0]  72.64,8.38 90 top
U$65  [#_INT#0]  75.18,8.38 90 top
U$66  [#PWR#0]  81.66,21.53 90 bottom
U$67  [SFE_LOGO_FLAME_STOP_.1]  64.9,30.48 0 top
U$68  [AS73310]  71.37,13.97 0 bottom
U$69  [#I�C#0]  61.21,17.14 0 bottom
U$70  [#A0#0]  78.36,25.91 0 bottom
U$71  [SPECTRAL_UV_SENSOR0]  71.37,15.75 0 bottom
U$72  [#_#SYN##0]  77.72,8.38 90 bottom
U$73  [#_#SYN##0]  77.72,8.38 90 top
U$74  [SFE_LOGO_NAME_.1]  71.37,25.27 0 top
U$75  [AS73310]  71.37,13.97 0 top
U$76  [SPECTRAL_UV_SENSOR0]  71.37,15.75 0 top
U$77  [#A1#0]  64.39,25.91 0 bottom
U$78  [#0#0]  63.75,27.3 270 bottom
U$79  [#0#0]  78.99,27.3 270 bottom
U$80  [#1#0]  63.75,24.51 90 bottom
U$81  [#1#0]  78.99,24.51 90 bottom
U$82  [PWR0]  107.57,25.78 0 top
U$83  [#_SCL#0]  90.93,8.38 90 bottom
U$84  [#_SDA#0]  93.47,8.38 90 bottom
U$85  [#_3V3#0]  96.01,8.38 90 bottom
U$86  [#_GND#0]  98.55,8.38 90 bottom
U$87  [#_INT#0]  101.09,8.38 90 bottom
U$88  [#_SCL#0]  90.93,8.38 90 top
U$89  [#_SDA#0]  93.47,8.38 90 top
U$90  [#_3V3#0]  96.01,8.38 90 top
U$91  [#_GND#0]  98.55,8.38 90 top
U$92  [#_INT#0]  101.09,8.38 90 top
U$93  [#PWR#0]  107.57,21.53 90 bottom
U$94  [SFE_LOGO_FLAME_STOP_.1]  90.81,30.48 0 top
U$95  [AS73310]  97.28,13.97 0 bottom
U$96  [#I�C#0]  87.12,17.14 0 bottom
U$97  [#A0#0]  104.27,25.91 0 bottom
U$98  [SPECTRAL_UV_SENSOR0]  97.28,15.75 0 bottom
U$99  [#_#SYN##0]  103.63,8.38 90 bottom
U$100  [#_#SYN##0]  103.63,8.38 90 top
U$101  [SFE_LOGO_NAME_.1]  97.28,25.27 0 top
U$102  [AS73310]  97.28,13.97 0 top
U$103  [SPECTRAL_UV_SENSOR0]  97.28,15.75 0 top
U$104  [#A1#0]  90.3,25.91 0 bottom
U$105  [#0#0]  89.66,27.3 270 bottom
U$106  [#0#0]  104.9,27.3 270 bottom
U$107  [#1#0]  89.66,24.51 90 bottom
U$108  [#1#0]  104.9,24.51 90 bottom
U$109  [PWR0]  133.48,25.78 0 top
U$110  [#_SCL#0]  116.84,8.38 90 bottom
U$111  [#_SDA#0]  119.38,8.38 90 bottom
U$112  [#_3V3#0]  121.92,8.38 90 bottom
U$113  [#_GND#0]  124.46,8.38 90 bottom
U$114  [#_INT#0]  127,8.38 90 bottom
U$115  [#_SCL#0]  116.84,8.38 90 top
U$116  [#_SDA#0]  119.38,8.38 90 top
U$117  [#_3V3#0]  121.92,8.38 90 top
U$118  [#_GND#0]  124.46,8.38 90 top
U$119  [#_INT#0]  127,8.38 90 top
U$120  [#PWR#0]  133.48,21.53 90 bottom
U$121  [SFE_LOGO_FLAME_STOP_.1]  116.71,30.48 0 top
U$122  [AS73310]  123.19,13.97 0 bottom
U$123  [#I�C#0]  113.03,17.14 0 bottom
U$124  [#A0#0]  130.17,25.91 0 bottom
U$125  [SPECTRAL_UV_SENSOR0]  123.19,15.75 0 bottom
U$126  [#_#SYN##0]  129.54,8.38 90 bottom
U$127  [#_#SYN##0]  129.54,8.38 90 top
U$128  [SFE_LOGO_NAME_.1]  123.19,25.27 0 top
U$129  [AS73310]  123.19,13.97 0 top
U$130  [SPECTRAL_UV_SENSOR0]  123.19,15.75 0 top
U$131  [#A1#0]  116.2,25.91 0 bottom
U$132  [#0#0]  115.57,27.3 270 bottom
U$133  [#0#0]  130.81,27.3 270 bottom
U$134  [#1#0]  115.57,24.51 90 bottom
U$135  [#1#0]  130.81,24.51 90 bottom
U$136  [PWR0]  159.38,25.78 0 top
U$137  [#_SCL#0]  142.75,8.38 90 bottom
U$138  [#_SDA#0]  145.29,8.38 90 bottom
U$139  [#_3V3#0]  147.83,8.38 90 bottom
U$140  [#_GND#0]  150.37,8.38 90 bottom
U$141  [#_INT#0]  152.91,8.38 90 bottom
U$142  [#_SCL#0]  142.75,8.38 90 top
U$143  [#_SDA#0]  145.29,8.38 90 top
U$144  [#_3V3#0]  147.83,8.38 90 top
U$145  [#_GND#0]  150.37,8.38 90 top
U$146  [#_INT#0]  152.91,8.38 90 top
U$147  [#PWR#0]  159.38,21.53 90 bottom
U$148  [SFE_LOGO_FLAME_STOP_.1]  142.62,30.48 0 top
U$149  [AS73310]  149.1,13.97 0 bottom
U$150  [#I�C#0]  138.94,17.14 0 bottom